# Altium PCB 400861.PcbDoc (part 1 of 7)
Units mm, origin at the board's own origin, x right, y up, seen from the top; angles counter-clockwise.
Board outline 145 x 63.5 mm, 8 copper layers (Top Side, Mid-Layer 1, Mid-Layer 2, Mid-Layer 3, Mid-Layer 4, Mid-Layer 5, Mid-Layer 6, Bottom Side), stack 1.529 mm thick; 287 components, 241 nets, 1164 pads, 3527 vias.
Unrouted connection lines stored in the file: 1.
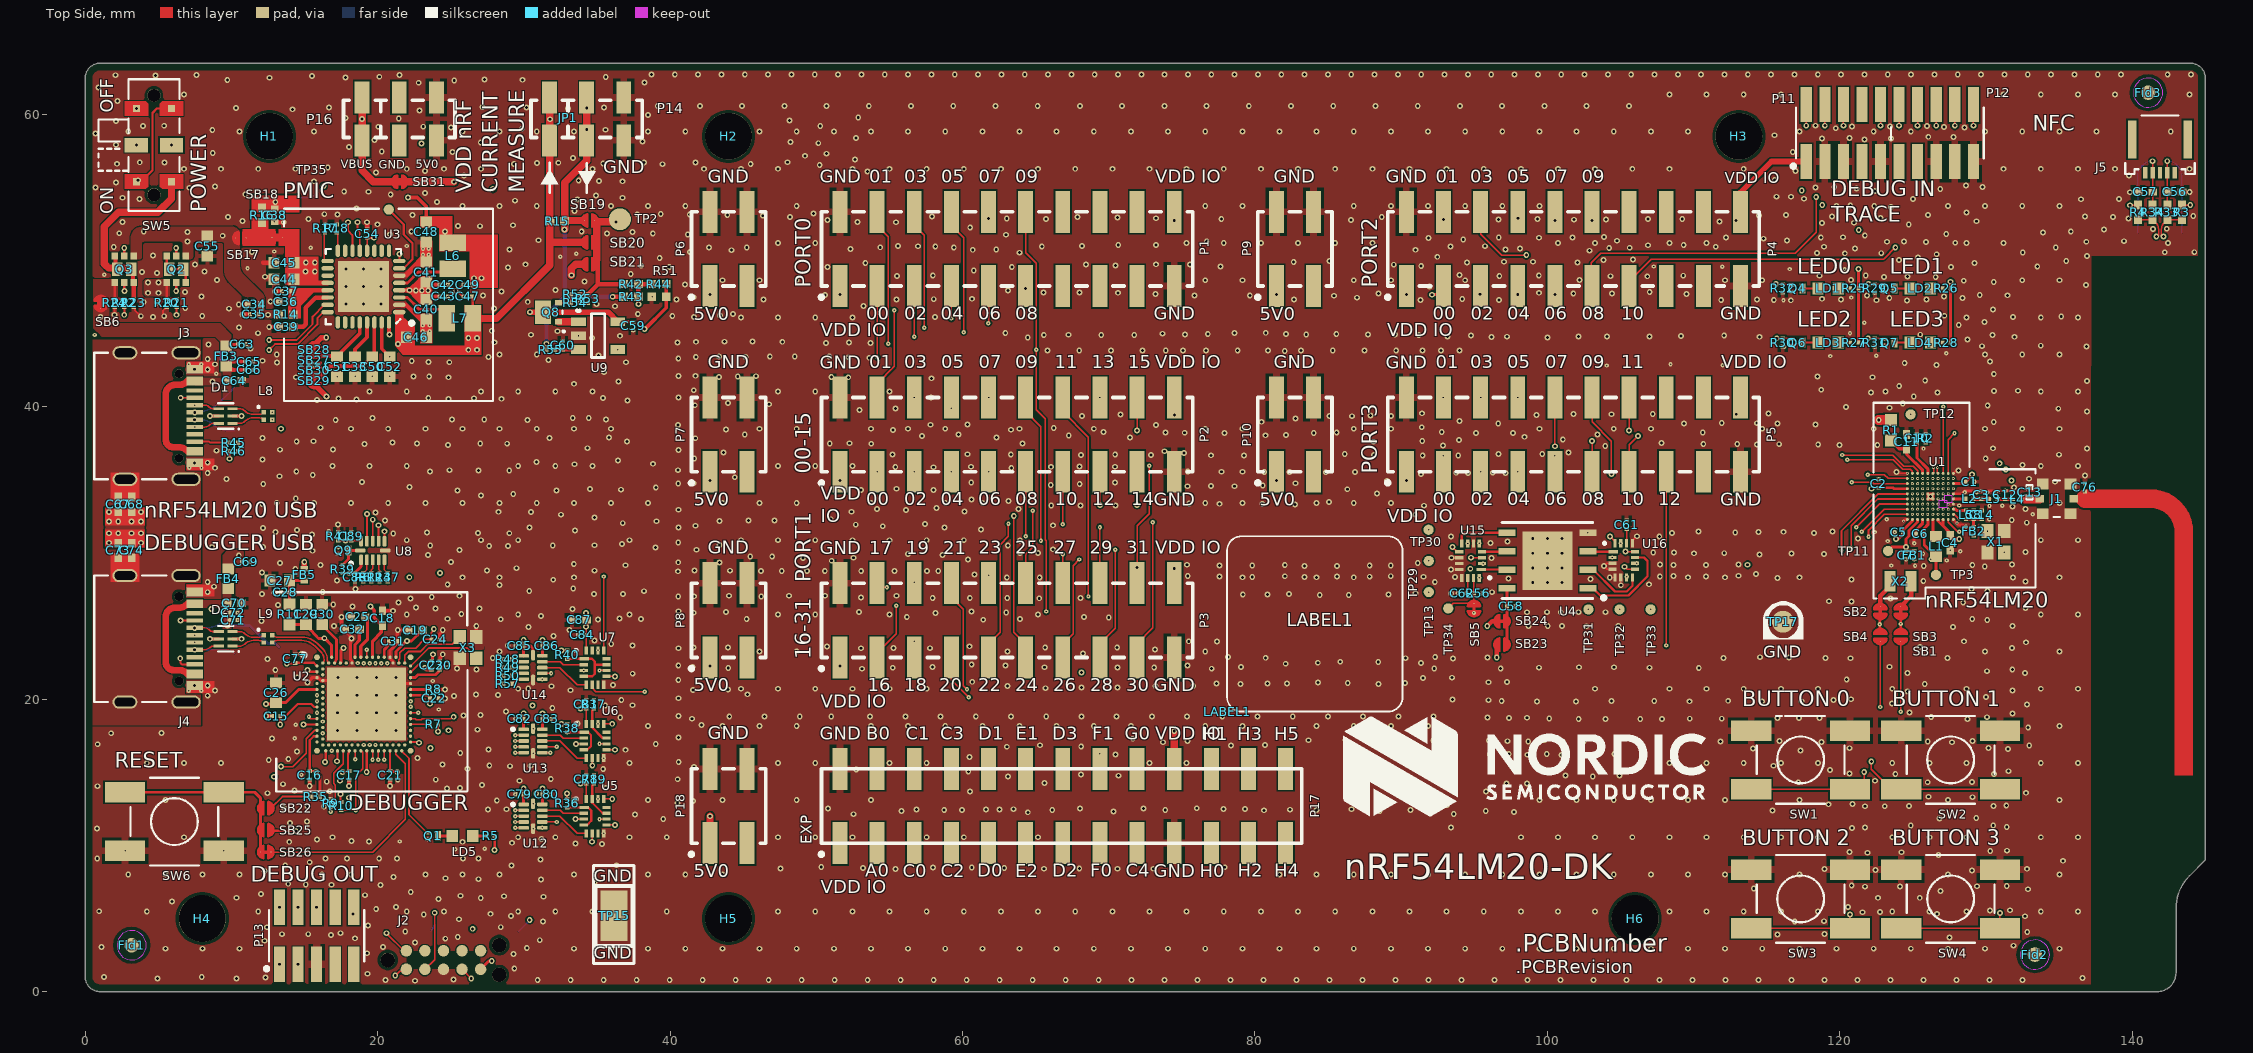
[diagram p0: Top Side view]
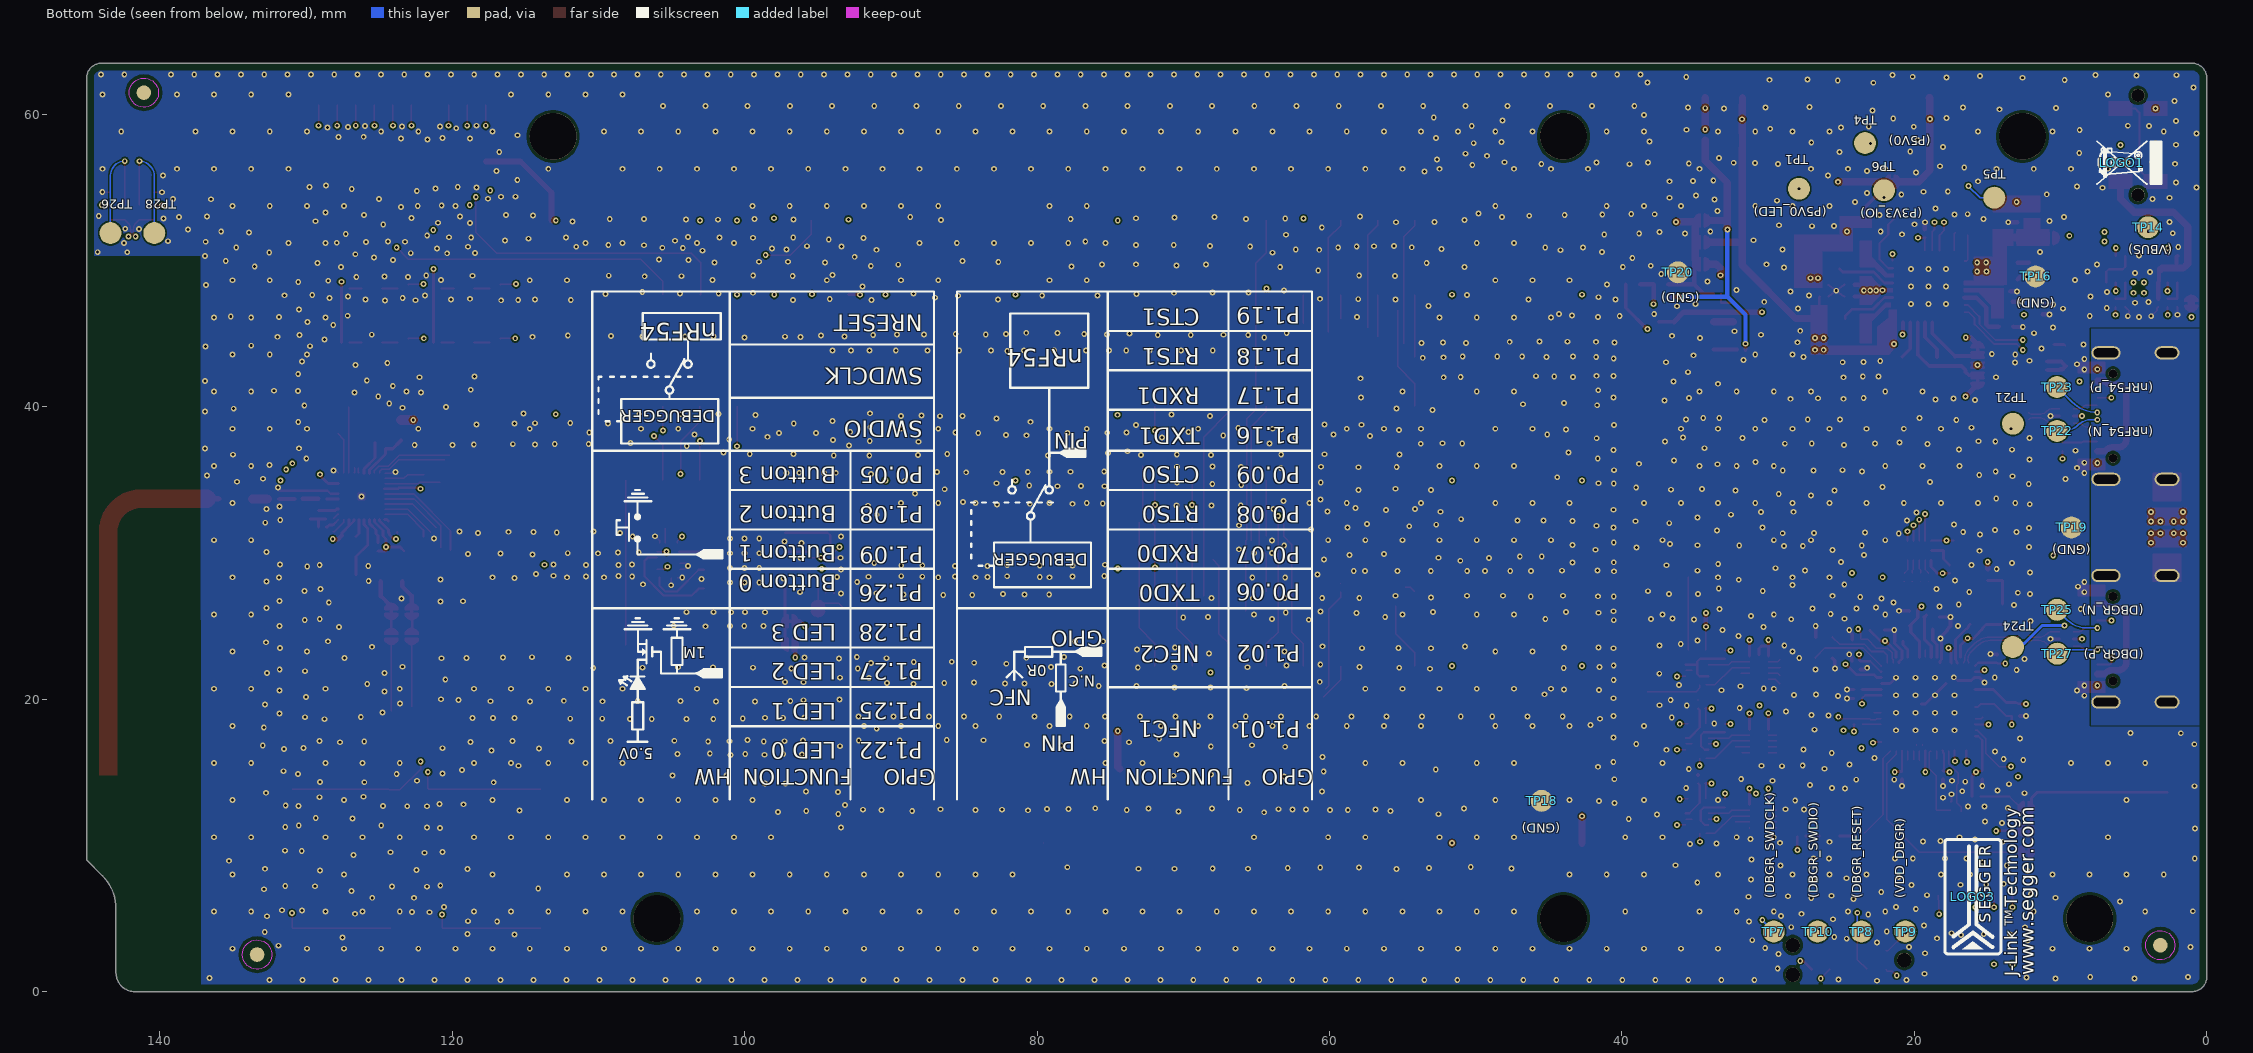
[diagram p1: Bottom Side view, seen from below]
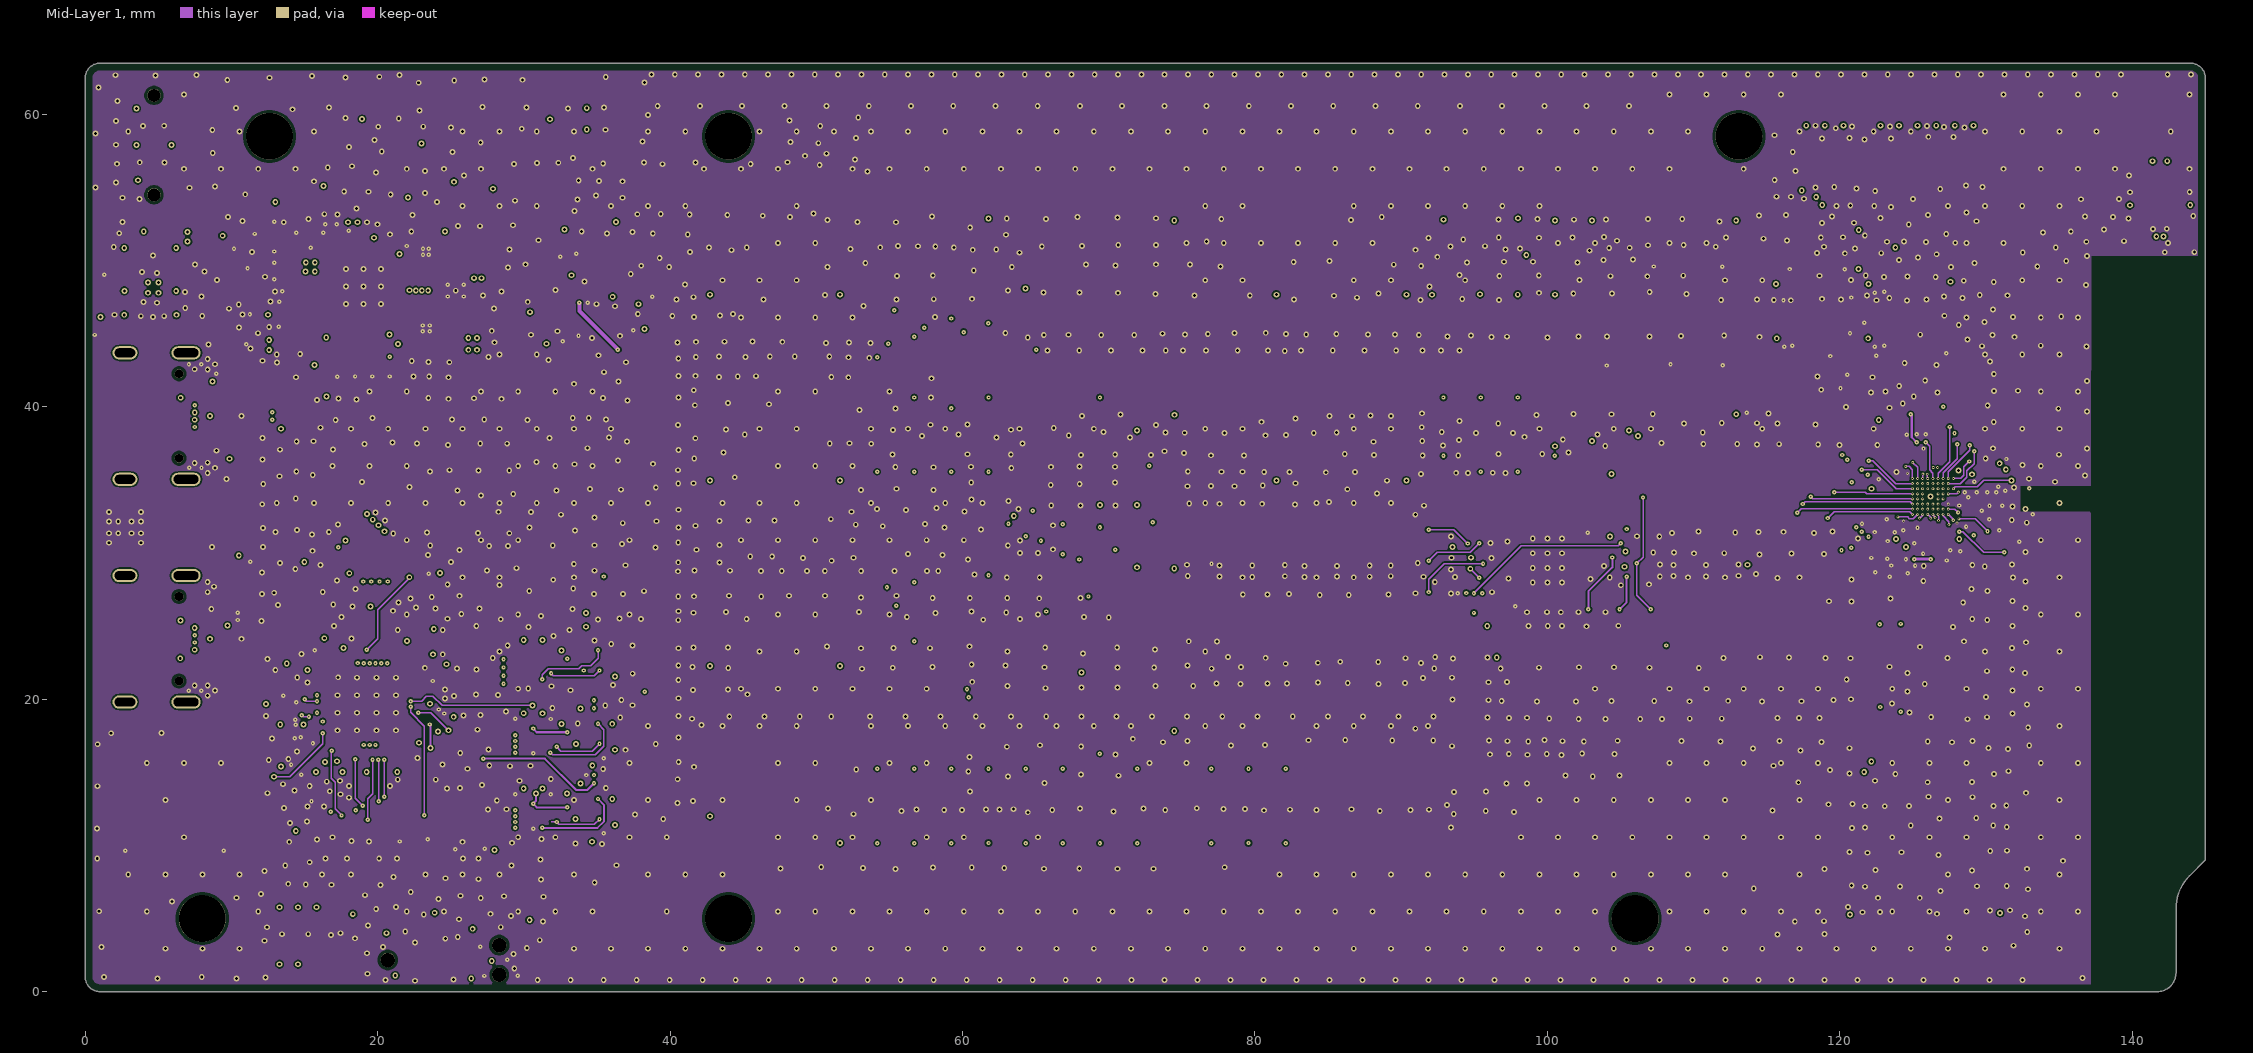
[diagram p2: Mid-Layer 1]
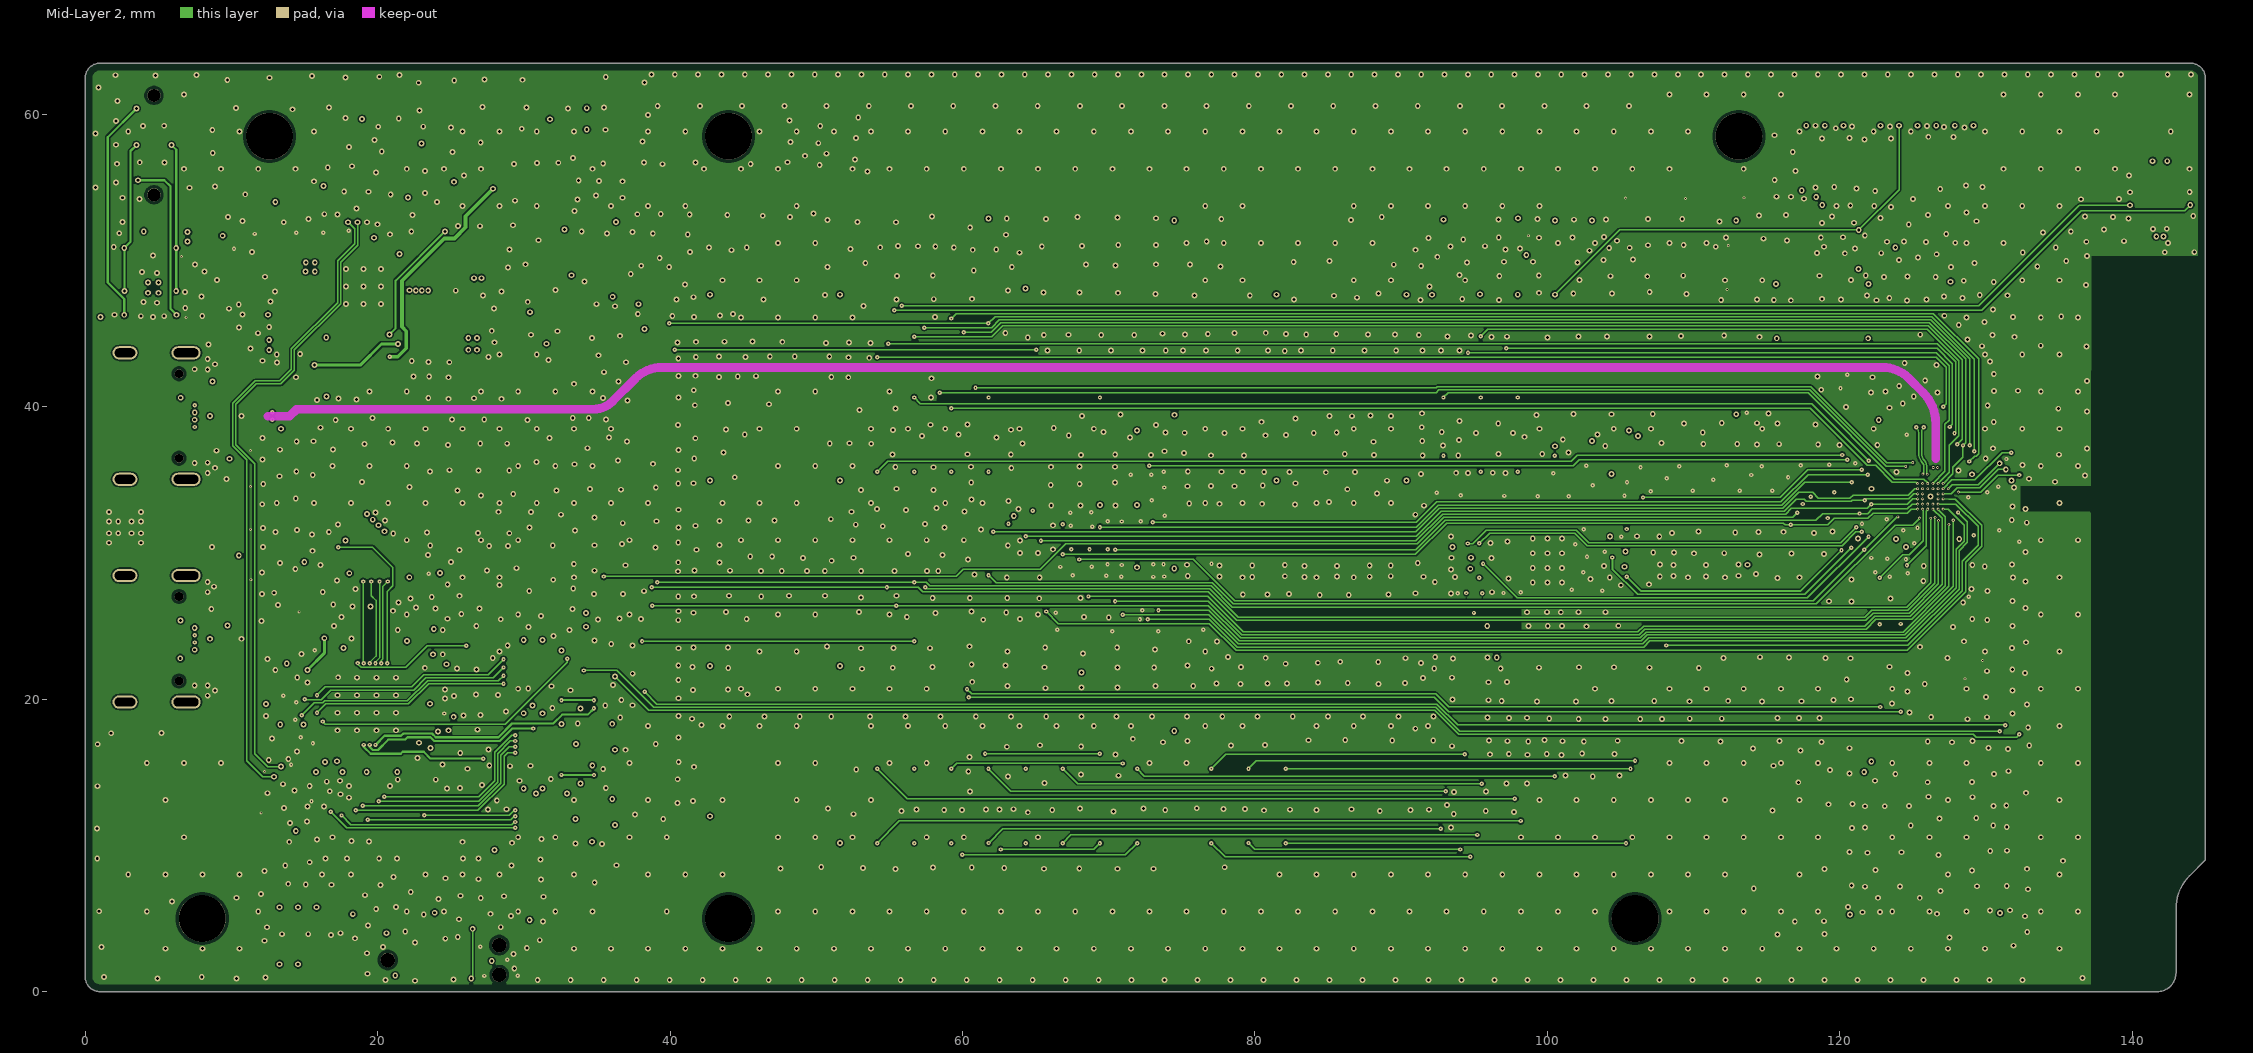
[diagram p3: Mid-Layer 2]
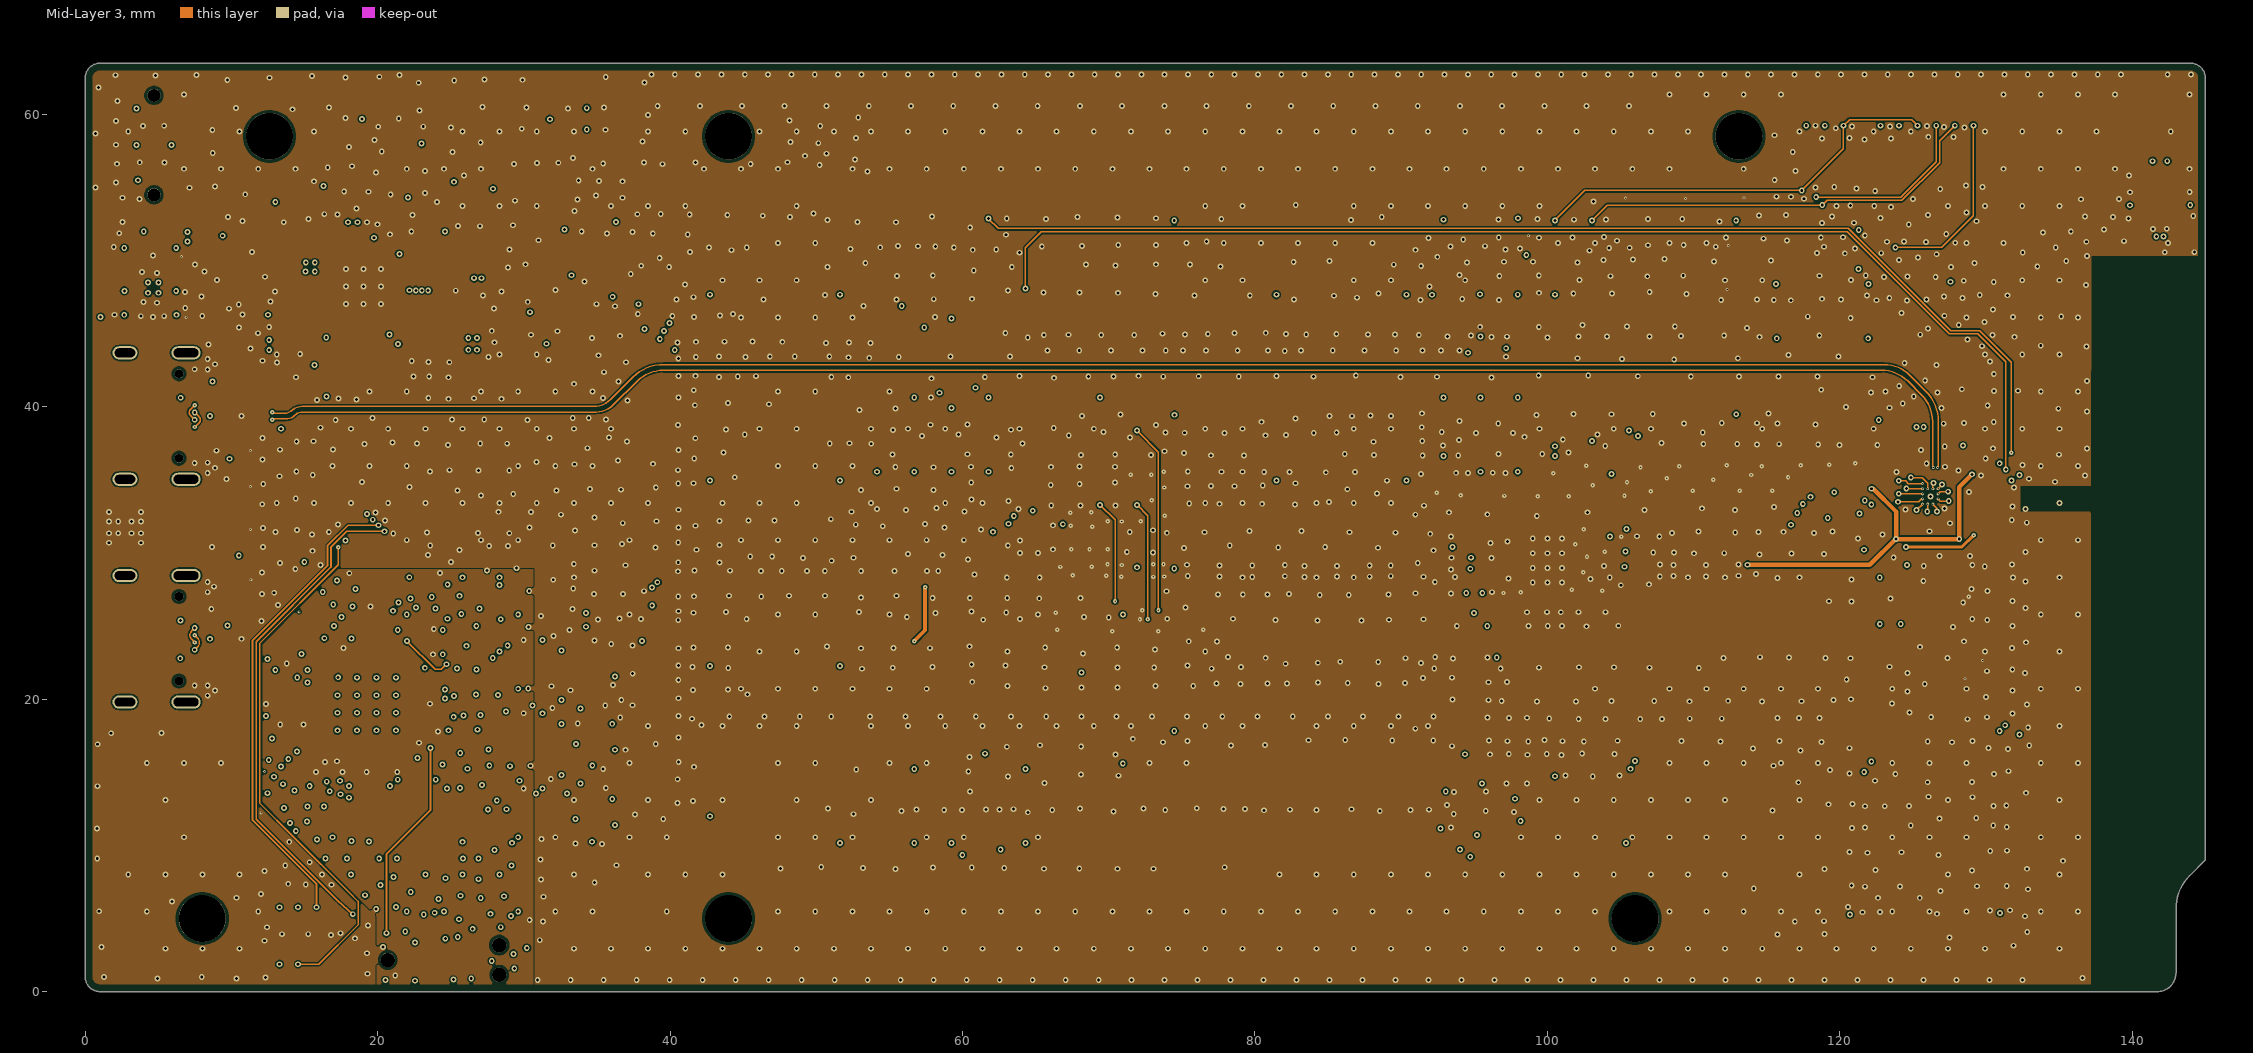
[diagram p4: Mid-Layer 3]
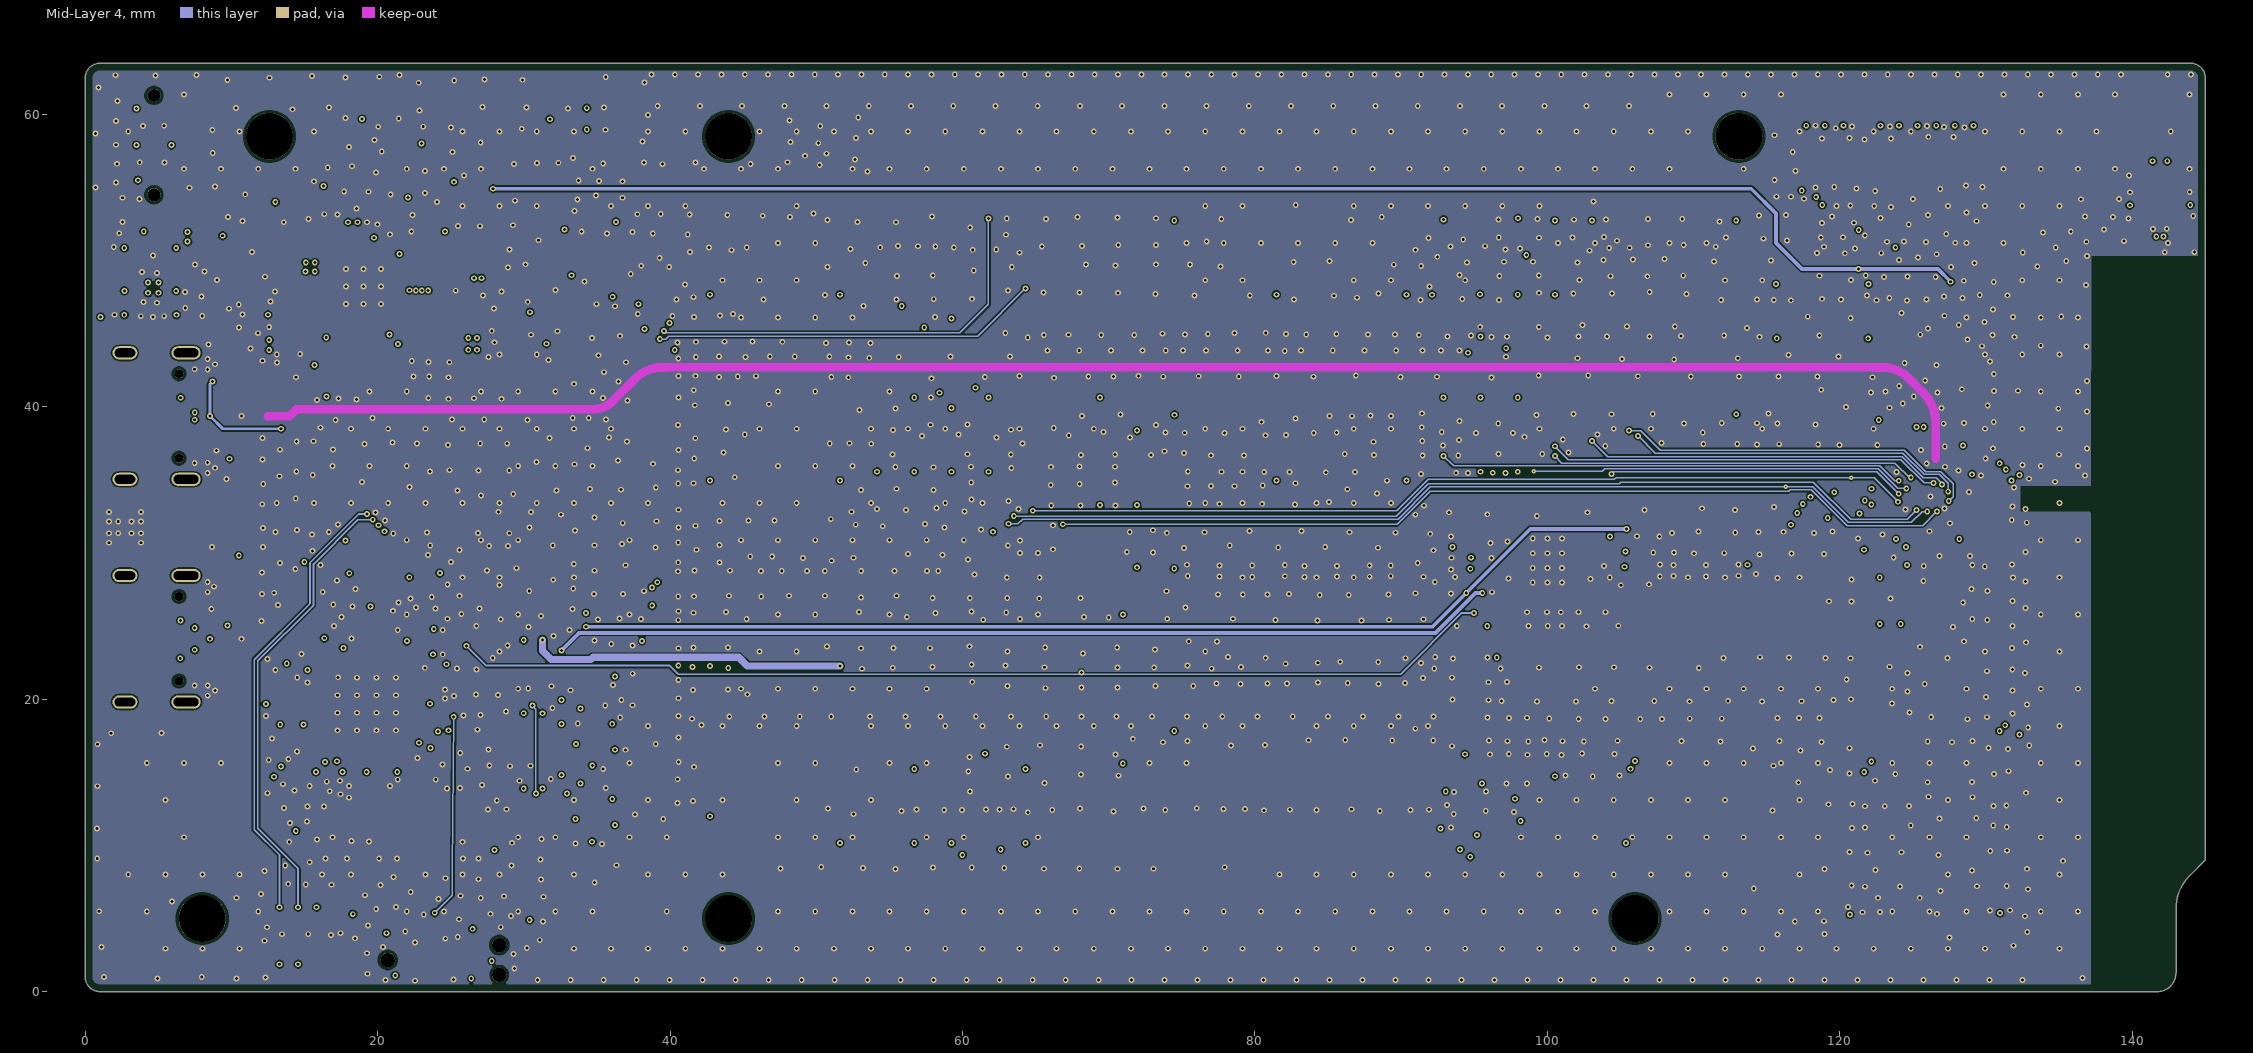
[diagram p5: Mid-Layer 4]
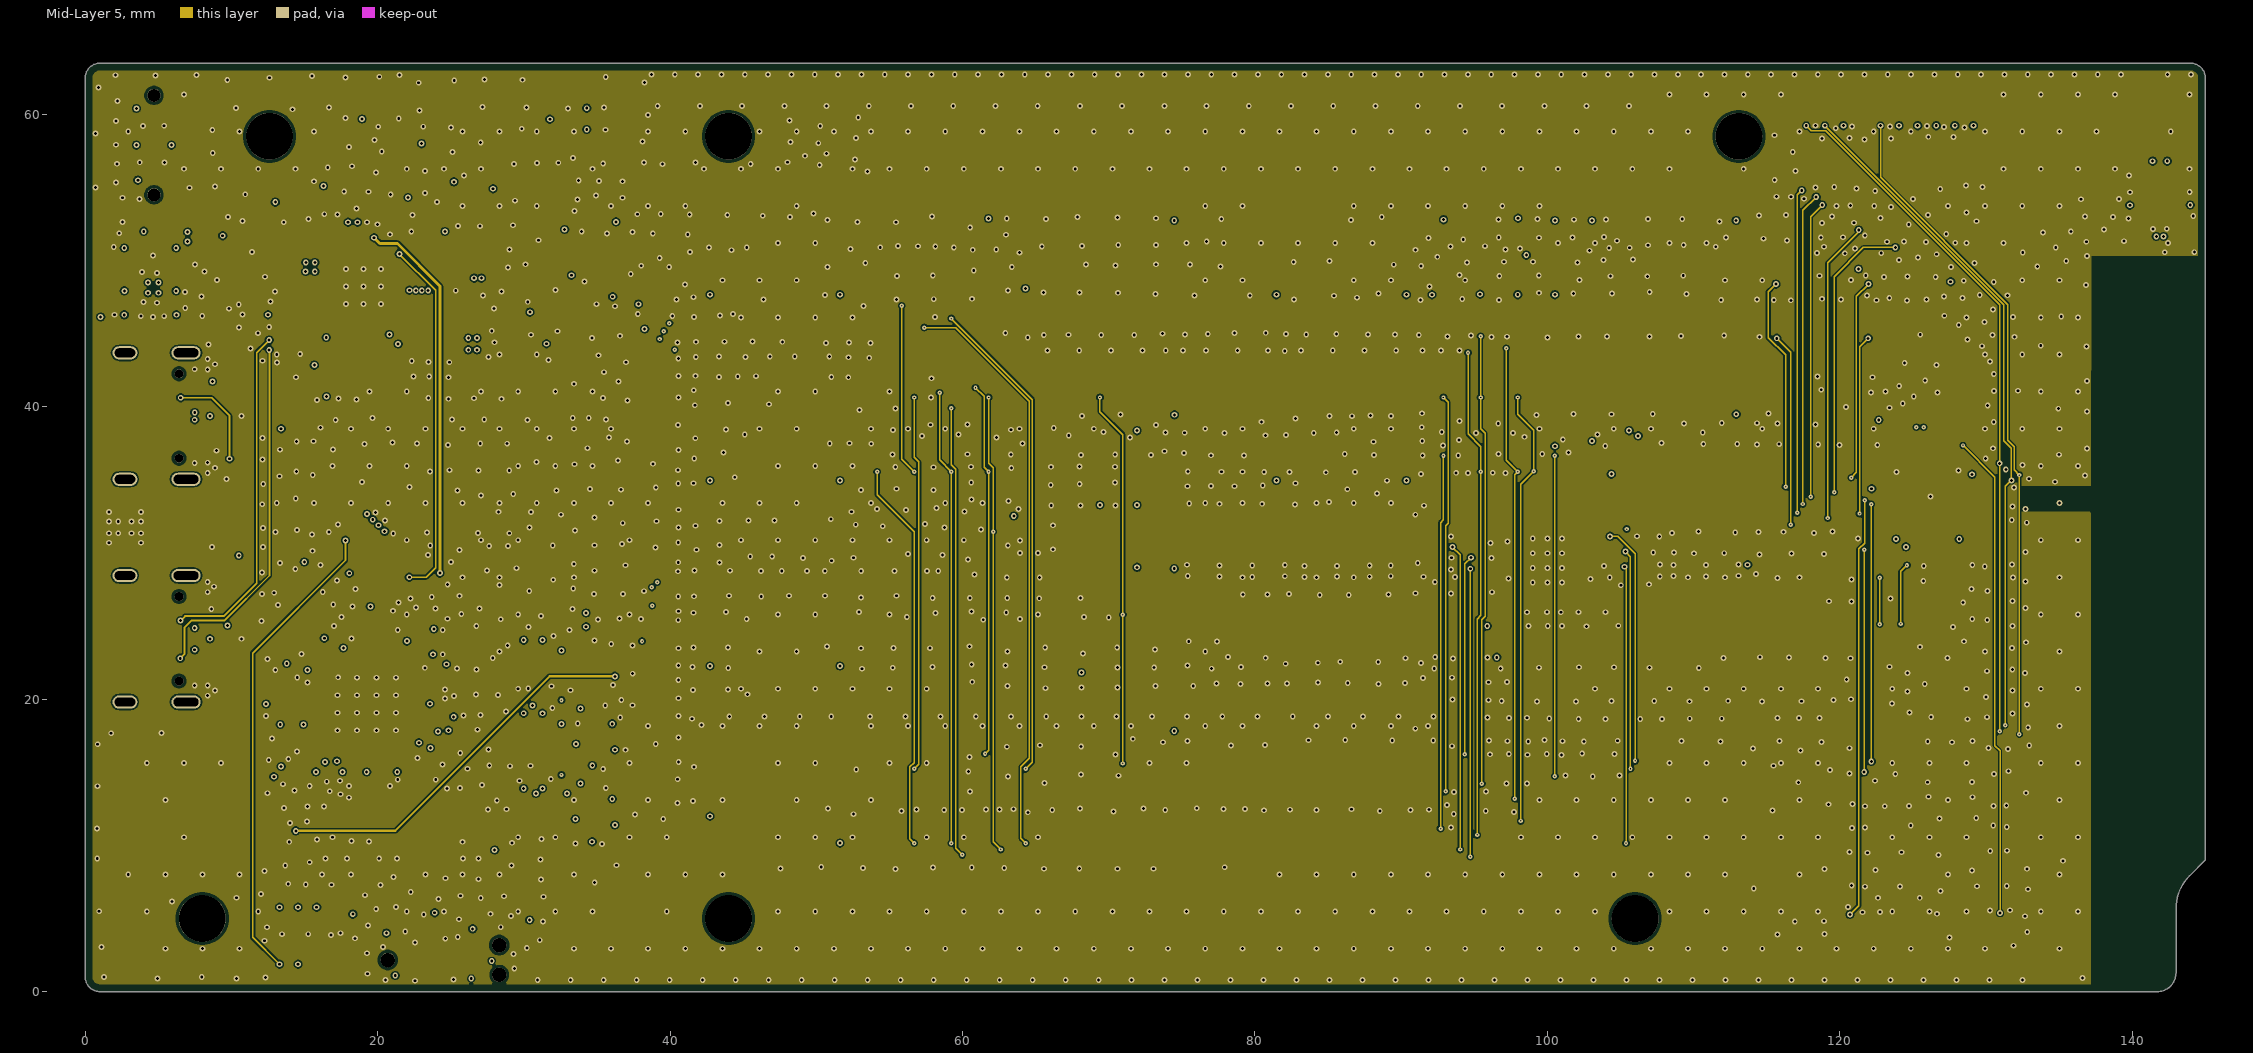
[diagram p6: Mid-Layer 5]
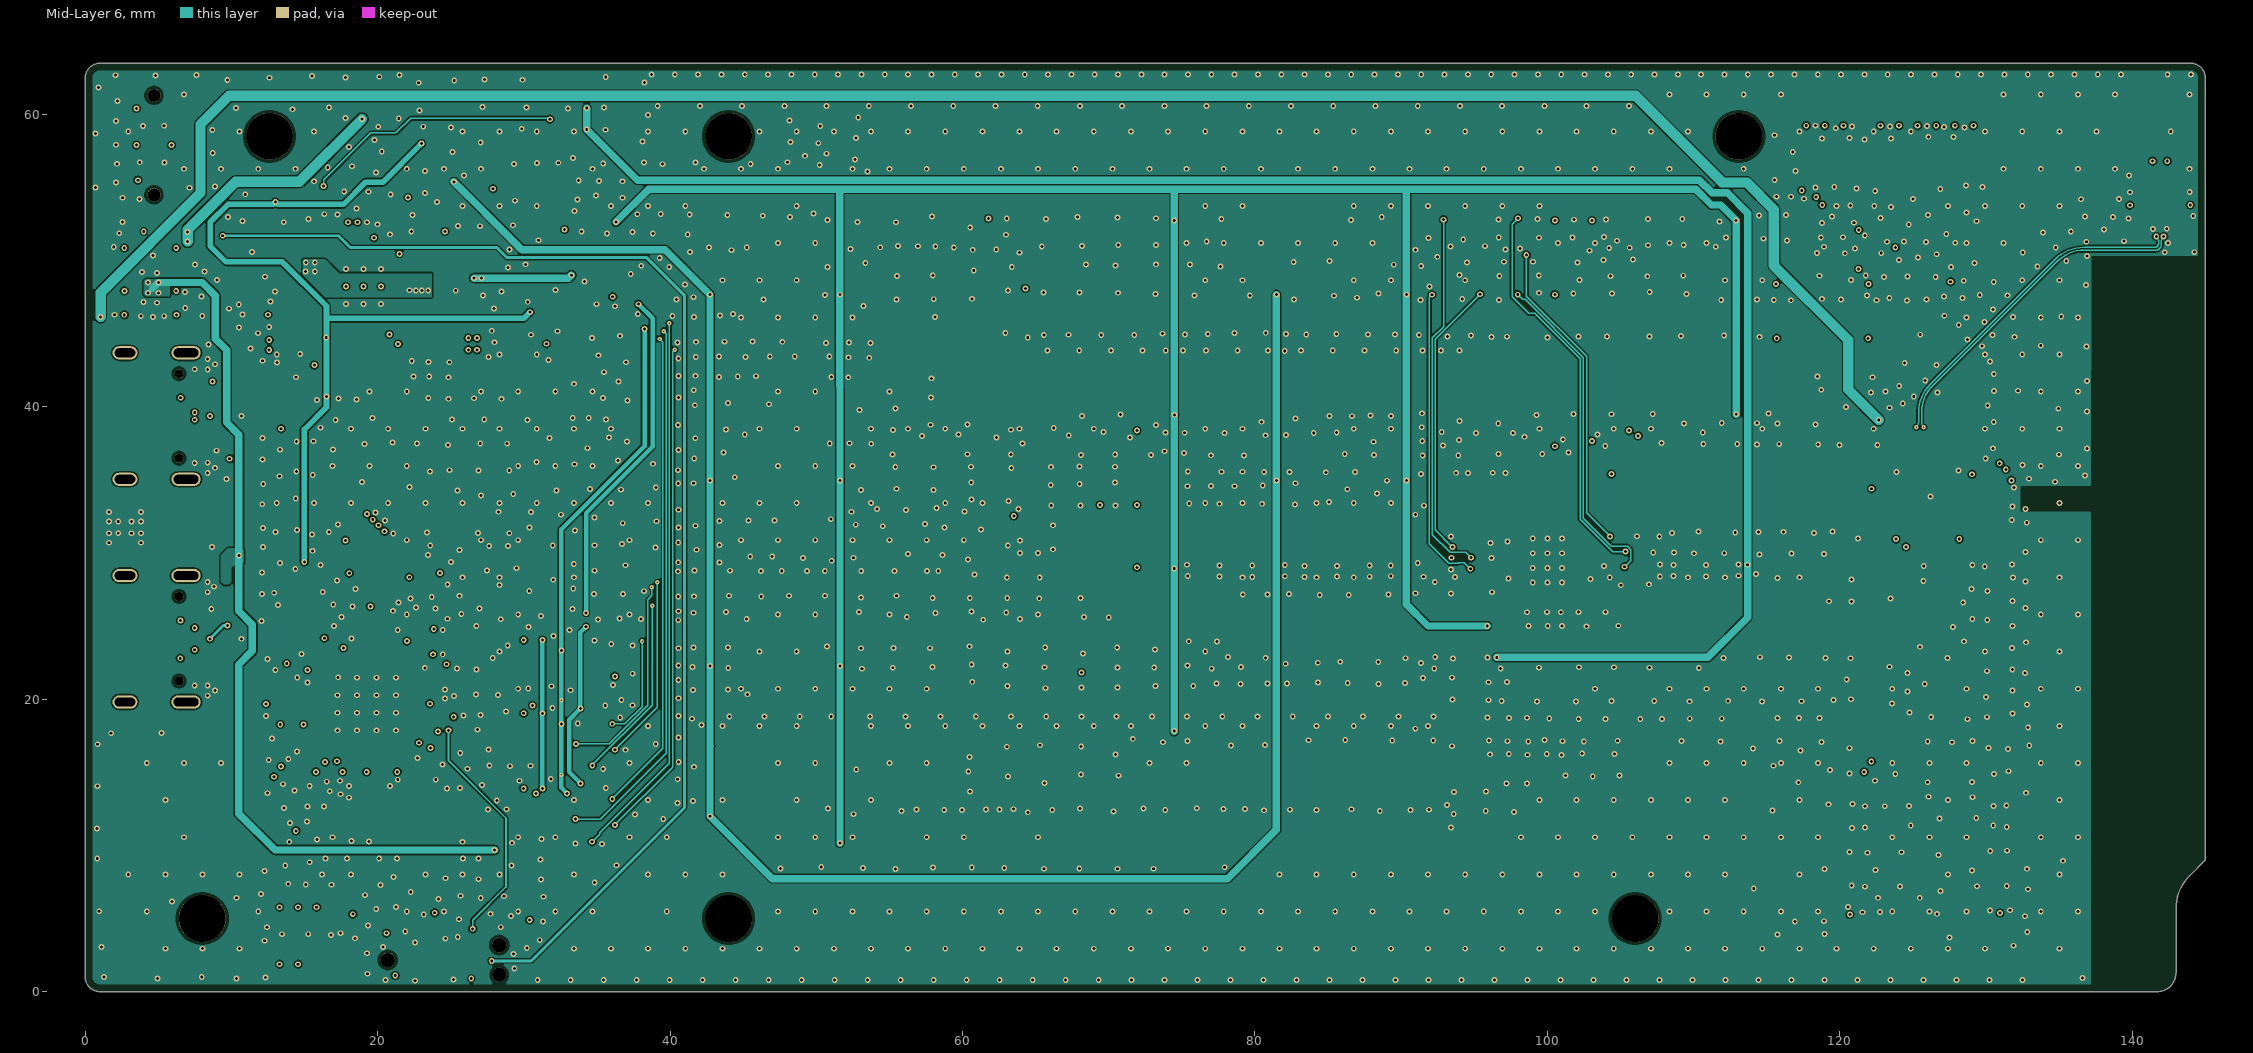
[diagram p7: Mid-Layer 6]
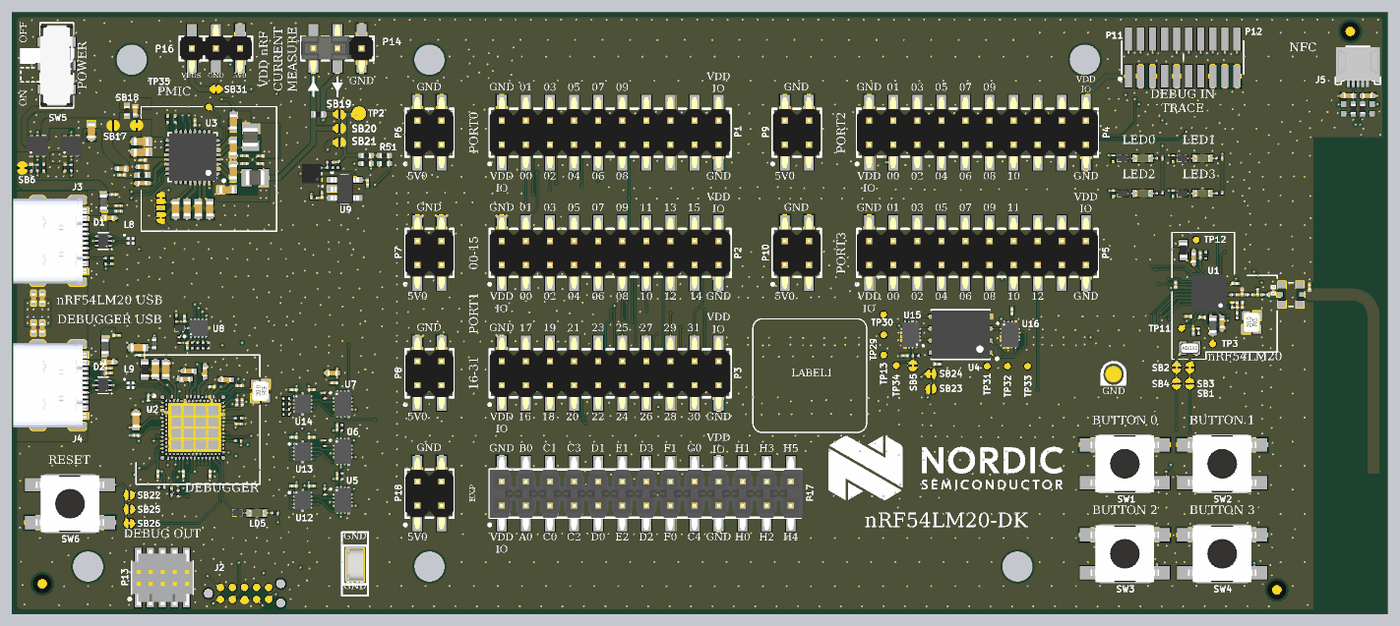
[diagram p13: 3D render of the assembled board from above, using the file's embedded part models]

## Layer stack, top to bottom
Top Solder: solder mask 0.015, WE-SM-0001, Dk 3.3
Top Side: signal copper 0.035
Dielectric 1: prepreg 0.07, WE-PP-0034, Dk 4.3
Mid-Layer 1: signal copper 0.025
Dielectric 2: prepreg 0.07, WE-PP-0034, Dk 4.3
Mid-Layer 2: signal copper 0.025
Dielectric 3: prepreg 0.07, WE-PP-0034, Dk 4.3
Mid-Layer 3: signal copper 0.025
Core 1: core 0.889, Core-041, Dk 4.8
Mid-Layer 4: signal copper 0.025
Dielectric 4: prepreg 0.07, WE-PP-0034, Dk 4.3
Mid-Layer 5: signal copper 0.025
Dielectric 5: prepreg 0.07, WE-PP-0034, Dk 4.3
Mid-Layer 6: signal copper 0.025
Dielectric 6: prepreg 0.07, WE-PP-0034, Dk 4.3
Bottom Side: signal copper 0.035
Bottom Solder: solder mask 0.015, WE-SM-0001, Dk 3.3

## Board outline
0,1 ccw(c1,1) 1,0 1.001,0 141.705,0 ccw(c141.705,1.295) 143,1.295 143,5.705 cw(c146.127,5.705) 143.916,7.916 145,9 145,62.5 ccw(c144,62.5) 144,63.5 144.002,63.5 1,63.5 ccw(c1,62.5) 0,62.5

## Design rules (kind name [scope] priority, off if disabled: settings)
BoardOutlineClearance [All] p1: gap=0.25 ignorepadtopadclearanceinfootprint=FALSE except(0: Arc-SplitContinuation Track-SplitContinuation SMDPad-SplitContinuation THPad-SplitContinuation Via-SplitContinuation Fill-SplitContinuation Poly-SplitContinuation Region-SplitContinuation Text-SplitContinuation; 0.5: Arc-OutlineEdge Track-OutlineEdge SMDPad-OutlineEdge THPad-OutlineEdge Via-OutlineEdge Fill-OutlineEdge Poly-OutlineEdge Region-OutlineEdge Text-OutlineEdge)
Clearance Clearance_fid [InComponent('Fid1')or InComponent('Fid2')or InComponent('Fid3')] p1: gap=0.1 ignorepadtopadclearanceinfootprint=FALSE except(0.25: Arc-Fill Arc-Poly Arc-Region Track-Fill Track-Poly Track-Region SMDPad-Fill SMDPad-Poly SMDPad-Region THPad-Fill THPad-Poly THPad-Region Via-Fill Via-Poly Via-Region Fill-Fill Fill-Poly Fill-Region Poly-Poly Poly-Region Region-Region)
Clearance Clearance_keepout [IsKeepOut] p2: gap=0 ignorepadtopadclearanceinfootprint=FALSE
Clearance Clearance_54L20_room [InComponentClass('nRF54L20')] p3: gap=0.09 ignorepadtopadclearanceinfootprint=FALSE
Clearance "Antenna RF path clearance" [InNetClass('RF')] p4: gap=0.15 ignorepadtopadclearanceinfootprint=FALSE
Clearance "GND polygons" [InPolygonClass('GND')] p5: gap=0.15 ignorepadtopadclearanceinfootprint=FALSE
Clearance Clearance_NPTH [(HoleDiameter > 0) and (PadIsPlated = 'False')] p6: gap=0.254 ignorepadtopadclearanceinfootprint=FALSE except(0.2: Arc-Hole Track-Hole SMDPad-THPad SMDPad-Hole Fill-Hole Poly-Hole Region-Hole)
Clearance "Schematic Clearance Constraint_5" [InComponent('H6')] p7: gap=0.254 ignorepadtopadclearanceinfootprint=TRUE except(0: Arc-Hole Track-Hole SMDPad-Hole THPad-Hole Via-Hole Fill-Hole Poly-Hole Region-Hole Text-Hole)
Clearance "Schematic Clearance Constraint_4" [InComponent('H1')] p8: gap=0.254 ignorepadtopadclearanceinfootprint=TRUE except(0: Arc-Hole Track-Hole SMDPad-Hole THPad-Hole Via-Hole Fill-Hole Poly-Hole Region-Hole Text-Hole)
Clearance "Schematic Clearance Constraint_3" [InComponent('H4')] p9: gap=0.254 ignorepadtopadclearanceinfootprint=TRUE except(0: Arc-Hole Track-Hole SMDPad-Hole THPad-Hole Via-Hole Fill-Hole Poly-Hole Region-Hole Text-Hole)
Clearance "Schematic Clearance Constraint_2" [InComponent('H3')] p10: gap=0.254 ignorepadtopadclearanceinfootprint=TRUE except(0: Arc-Hole Track-Hole SMDPad-Hole THPad-Hole Via-Hole Fill-Hole Poly-Hole Region-Hole Text-Hole)
Clearance "Schematic Clearance Constraint_1" [InComponent('H2')] p11: gap=0.254 ignorepadtopadclearanceinfootprint=TRUE except(0: Arc-Hole Track-Hole SMDPad-Hole THPad-Hole Via-Hole Fill-Hole Poly-Hole Region-Hole Text-Hole)
Clearance "Schematic Clearance Constraint" [InComponent('H5')] p12: gap=0.254 ignorepadtopadclearanceinfootprint=TRUE except(0: Arc-Hole Track-Hole SMDPad-Hole THPad-Hole Via-Hole Fill-Hole Poly-Hole Region-Hole Text-Hole)
Clearance [All] p13: gap=0.1 ignorepadtopadclearanceinfootprint=FALSE except(0: Region-Region; 0.051: Text-Text)
ComponentClearance "Jumper clearance" [All] p1 off: gap=0 collisioncheckmode=3 verticalgap=0 showdistances=FALSE checkcomponentboundary=TRUE
ComponentClearance "Solder bridge overlap" [All] p2 off: gap=0.254 collisioncheckmode=3 verticalgap=2540 showdistances=FALSE donotcheckwithout3dbody=TRUE checkcomponentboundary=TRUE
ComponentClearance [All] p3 off: gap=0 collisioncheckmode=3 verticalgap=2540 showdistances=TRUE
DiffPairsRouting DiffPairsRouting_NFC [InDifferentialPair('NFC')] p1: maxlimit=0.4 minlimit=0.1 mostfreqgap=0.1 toplayer_minwidth=0.1 toplayer_maxwidth=0.5 toplayer_prefwidth=0.1 midlayer1_minwidth=0.1 midlayer1_maxwidth=0.5 midlayer1_prefwidth=0.1 midlayer2_minwidth=0.1 midlayer2_maxwidth=0.5 midlayer2_prefwidth=0.1 midlayer3_minwidth=0.1 midlayer3_maxwidth=0.5 midlayer3_prefwidth=0.1 midlayer4_minwidth=0.1 midlayer4_maxwidth=0.5 midlayer4_prefwidth=0.1 midlayer5_minwidth=0.1 midlayer5_maxwidth=0.5 midlayer5_prefwidth=0.1 midlayer6_minwidth=0.1 midlayer6_maxwidth=0.5 midlayer6_prefwidth=0.1 bottomlayer_minwidth=0.1 bottomlayer_maxwidth=0.5 bottomlayer_prefwidth=0.1 maxuncoupledlength=12.7
DiffPairsRouting DiffPairsRouting_USB [InNetClass('USB')] p2: maxlimit=0.3 minlimit=0.127 mostfreqgap=0.3 toplayer_maxgap=0.127 toplayer_prefgap=0.127 toplayer_minwidth=0.099 toplayer_maxwidth=0.099 toplayer_prefwidth=0.099 midlayer1_maxgap=0.127 midlayer1_prefgap=0.127 midlayer1_minwidth=0.049 midlayer1_maxwidth=0.049 midlayer1_prefwidth=0.049 midlayer2_maxgap=0.127 midlayer2_prefgap=0.127 midlayer2_minwidth=0.049 midlayer2_maxwidth=0.049 midlayer2_prefwidth=0.049 midlayer3_mingap=0.3 midlayer3_minwidth=0.09 midlayer3_maxwidth=0.09 midlayer3_prefwidth=0.09 midlayer4_mingap=0.3 midlayer4_minwidth=0.09 midlayer4_maxwidth=0.09 midlayer4_prefwidth=0.09 midlayer5_maxgap=0.127 midlayer5_prefgap=0.127 midlayer5_minwidth=0.049 midlayer5_maxwidth=0.049 midlayer5_prefwidth=0.049 midlayer6_maxgap=0.127 midlayer6_prefgap=0.127 midlayer6_minwidth=0.049 midlayer6_maxwidth=0.049 midlayer6_prefwidth=0.049 bottomlayer_maxgap=0.127 bottomlayer_prefgap=0.127 bottomlayer_minwidth=0.099 bottomlayer_maxwidth=0.099 bottomlayer_prefwidth=0.099 impedanceprofiledriven=TRUE impedanceprofileid={92417A29-2017-4163-8AF2-36A2DA04E51D} impedanceprofilevalue=90.000000 maxuncoupledlength=12.7
Height [All] p1 off: minheight=0 maxheight=25.4 prefheight=12.7
HoleSize [All] p1: absolutevalues=TRUE maxlimit=5 minlimit=0.025 maxpercent=80.000 minpercent=20.000
HoleToHoleClearance HoleToHoleClearance_nRF54 [WithinRoom('nRF54L20')] p1: gap=0.1 allowstackedmicrovias=TRUE
HoleToHoleClearance [All] p2: gap=0.15 allowstackedmicrovias=TRUE
MatchedLengths "Schematic Matched Net Lengths" [InNetClass('TRACE')] p1: tolerance=25.4 checknetsindiffpair=FALSE checkdiffpairvsdiffpair=TRUE checkxsignals=TRUE checkothers=TRUE usedelayunits=TRUE delaytolerance=500.000000
MinimumSolderMaskSliver [All] p1: minsoldermaskwidth=0.1
PolygonConnect "VBUS polygons" [InNet('VBUS') or InNet('VBUS_nRF') or InNet('VBUS_DBGR')] p1: connectstyle=Direct reliefconductorwidth=0.25 reliefentries=4 polygonreliefangle="90 Angle" airgapwidth=0.15
PolygonConnect "GND Polygon RF Comp" [InComponent('C3') or InComponent('C12') or InComponent('C13')] p2: connectstyle=Direct reliefconductorwidth=0.25 reliefentries=4 polygonreliefangle="90 Angle" airgapwidth=0.15
PolygonConnect "GND Polygon and Vias" [IsVia and InNet('GND')] p3: connectstyle=Direct reliefconductorwidth=0.254 reliefentries=4 polygonreliefangle="90 Angle" airgapwidth=0.254
PolygonConnect "GND Polygon and connectors" [InNet('GND') and InComponent('P*')] p4: connectstyle=Relief reliefconductorwidth=0.5 reliefentries=4 polygonreliefangle="90 Angle" conductorbypadedge=TRUE mindistance=0.25 enablemindistance=TRUE airgapwidth=0.2
PolygonConnect "GND Polygon and switches" [InNet('GND') and InComponent('SW*')] p5: connectstyle=Relief reliefconductorwidth=0.5 reliefentries=4 polygonreliefangle="90 Angle" conductorbypadedge=TRUE mindistance=0.25 enablemindistance=TRUE airgapwidth=0.2
PolygonConnect PolygonConnect_1 [IsPad and not InNet('GND') vs IsPolygon] p6: connectstyle=Direct reliefconductorwidth=0.254 reliefentries=4 polygonreliefangle="90 Angle" airgapwidth=0.254
PolygonConnect "GND Polygon and components" [InNet('GND') and InComponent('R*') or InComponent('C*') or InNamedPolygon('GND_nRF54')] p7: connectstyle=Relief reliefconductorwidth=0.3 reliefentries=4 polygonreliefangle="90 Angle" conductorbypadedge=TRUE mindistance=0.25 enablemindistance=TRUE airgapwidth=0.2
PolygonConnect [All] p8: connectstyle=Direct reliefconductorwidth=0.254 reliefentries=4 polygonreliefangle="90 Angle" airgapwidth=0.254
RoomDefinition Flash [InComponentClass('Flash')] p1: confinementstyle=ConfineIn formatcopy=TRUE lockcomponents=FALSE outline 94.28,17.972 94.28,20.772 95.926,20.772 95.926,21.147 96.451,21.147 96.451,25.647 104.181,25.647 104.181,19.997 95.683,19.997 95.683,17.972
RoomDefinition nRF54 [InComponentClass('nRF54')] p2: confinementstyle=ConfineIn formatcopy=TRUE lockcomponents=FALSE outline 123.856,31.657 128.476,31.657 128.476,36.5 123.856,36.5
RoomDefinition "Power Switch" [InComponentClass('Power Switch')] p3: confinementstyle=ConfineIn formatcopy=TRUE lockcomponents=FALSE outline -0.056,53.17 -0.056,62.831 9.156,62.831 9.156,49.279 12.679,49.279 12.679,46.721 6.779,46.721 6.779,46.302 6.104,46.302 3.854,46.302 3.209,46.302 2.141,46.302 1.486,46.302 1.486,47.557 0.816,47.557 0.816,53.17
RoomDefinition "Current measurments" [InComponentClass('Current measurments')] p4: confinementstyle=ConfineIn formatcopy=TRUE lockcomponents=FALSE outline 30.081,58.98 30.081,62.231 30.109,62.231 30.109,63.351 38.491,63.351 38.491,57.52 33.505,57.52 33.505,55.695 31.095,55.695 31.095,57.52 30.109,57.52 30.109,58.98
RoomDefinition nPM1300 [InComponentClass('nPM1300')] p5: confinementstyle=ConfineIn formatcopy=TRUE lockcomponents=FALSE outline 9.694,50.696 9.694,52.404 11.395,52.404 11.395,54.306 13.25,54.306 13.25,55.585 20.794,55.585 20.794,56.093 22.089,56.093 22.089,59.318 24.647,59.318 24.647,56.194 29.168,56.194 29.168,53.636 27.591,53.636 27.591,44.568 24.129,44.568 24.129,43.946 20.805,43.946 20.805,41.695 20.604,41.695 20.604,40.64 18.396,40.64 18.396,41.521 18.271,41.521 18.271,42.396 15.946,42.396 15.946,44.821 12.527,44.821 12.527,45.816 10.771,45.816 10.771,46.346 10.446,46.346 10.446,50.696
RoutingVias RoutingVia_RF54L20 [WithinRoom('nRF54')] p1: holewidth=0.711 width=1.27 viastyle="Through Hole" minholewidth=0.711 minwidth=1.27 maxholewidth=0.711 maxwidth=1.27 useviatemplates=TRUE viatemplateguid#1={EEEC76CF-32D6-49DC-93D9-2D917E6DBA36} viatemplateguid#2={30F8C89D-5C5B-4339-859E-098A5C8AA5FD} viatemplateguid#3={3D985D34-457C-4E2A-A3DE-9B1BD65E1015} viatemplatename#1=v20h10 viatemplatename#2=v30h10m0 viatemplatename#3=v40h20m0mx0
RoutingVias RoutingVia_Blind [IsBlindVia] p2: holewidth=0.711 width=1.27 viastyle="Through Hole" minholewidth=0.711 minwidth=1.27 maxholewidth=0.711 maxwidth=1.27 useviatemplates=TRUE viatemplateguid#1={30F8C89D-5C5B-4339-859E-098A5C8AA5FD} viatemplatename#1=v30h10m0
RoutingVias RoutingVia_Burried [InDrillLayerPair('Mid-Layer 3 - Mid-Layer 4')] p3: holewidth=0.711 width=1.27 viastyle="Through Hole" minholewidth=0.711 minwidth=1.27 maxholewidth=0.711 maxwidth=1.27 useviatemplates=TRUE viatemplateguid#1={3D985D34-457C-4E2A-A3DE-9B1BD65E1015} viatemplatename#1=v40h20m0mx0
RoutingVias RoutingVia_Burried_laser [InDrillLayerPair('Mid-Layer 1 - Mid-Layer 2') or  InDrillLayerPair('Mid-Layer 2 - Mid-Layer 3') or InDrillLayerPair('Mid-Layer 4 - Mid-Layer 5') or  InDrillLayerPair('Mid-Layer 5 - Mid-Layer 6')] p4: holewidth=0.711 width=1.27 viastyle="Through Hole" minholewidth=0.711 minwidth=1.27 maxholewidth=0.711 maxwidth=1.27 useviatemplates=TRUE viatemplateguid#1={30F8C89D-5C5B-4339-859E-098A5C8AA5FD} viatemplatename#1=v30h10m0
RoutingVias RoutingVia_Thru [IsThruVia] p5: holewidth=0.25 width=0.5 viastyle="Through Hole" minholewidth=0.1 minwidth=0.2 maxholewidth=0.5 maxwidth=1.2 useviatemplates=TRUE viatemplateguid#1={3D985D34-457C-4E2A-A3DE-9B1BD65E1015} viatemplatename#1=v40h20m0mx0
RoutingVias "Schematic Routing Via Style_5" [InComponent('H5')] p6: holewidth=0 width=0 viastyle="Through Hole" minholewidth=0 minwidth=0 maxholewidth=2 maxwidth=2
RoutingVias "Schematic Routing Via Style_4" [InComponent('H1')] p7: holewidth=0 width=0 viastyle="Through Hole" minholewidth=0 minwidth=0 maxholewidth=2 maxwidth=2
RoutingVias "Schematic Routing Via Style_3" [InComponent('H6')] p8: holewidth=0 width=0 viastyle="Through Hole" minholewidth=0 minwidth=0 maxholewidth=2 maxwidth=2
RoutingVias "Schematic Routing Via Style_2" [InComponent('H4')] p9: holewidth=0 width=0 viastyle="Through Hole" minholewidth=0 minwidth=0 maxholewidth=2 maxwidth=2
RoutingVias "Schematic Routing Via Style_1" [InComponent('H2')] p10: holewidth=0 width=0 viastyle="Through Hole" minholewidth=0 minwidth=0 maxholewidth=2 maxwidth=2
RoutingVias "Schematic Routing Via Style" [InComponent('H3')] p11: holewidth=0 width=0 viastyle="Through Hole" minholewidth=0 minwidth=0 maxholewidth=2 maxwidth=2
ShortCircuit "GND to PVSS" [InNet('PVSS1') or InNet('PVSS2') vs InNet('GND')] p1: allowed=TRUE
ShortCircuit P11_P12 [InComponent('P11') vs InComponent('P12')] p2: allowed=TRUE
ShortCircuit [All] p3: allowed=FALSE
SolderMaskExpansion SolderMaskExpansion_Comp1 [HasFootprint('BGA98C35P10X10_367X385X86') or HasFootprint('AQFN40P700X700X85_HS-99N') or HasFootprint('XFDFN40P180X120X40-8M')] p1: expansion=0.025 istentingtop=FALSE
SolderMaskExpansion SolderMaskExpansion_Comp2 [HasFootprint('Nordic_QFN50P500X500X90-33N') or HasFootprint('SD-80259-001')] p2: expansion=0.05 istentingtop=FALSE
SolderMaskExpansion SolderMaskExpansion_Via [IsVia] p3: expansion=0.102 istentingtop=TRUE
SolderMaskExpansion [All] p4: expansion=0.102 istentingtop=FALSE
SupplyNets "Schematic Supply Nets_6" [InNet('5V0:CONN')] p1: voltage=0.000
SupplyNets "Schematic Supply Nets_15" [InNet('VDD:IO')] p2: voltage=0.000
SupplyNets "Schematic Supply Nets_14" [InNet('VDD:SW_PU')] p3: voltage=0.000
SupplyNets "Schematic Supply Nets_11" [InNet('VDD:nRF_PMIC')] p4: voltage=0.000
SupplyNets "Schematic Supply Nets_4" [InNet('VDD:SW')] p5: voltage=0.000
SupplyNets "Schematic Supply Nets_3" [InNet('P5V0:LED')] p6: voltage=0.000
SupplyNets "Schematic Supply Nets_7" [InNet('VDD:SWD0')] p7: voltage=0.000
SupplyNets "Schematic Supply Nets_10" [InNet('VBUS:DBGR')] p8: voltage=0.000
SupplyNets "Schematic Supply Nets_2" [InNet('VDD:nRF')] p9: voltage=0.000
SupplyNets "Schematic Supply Nets_13" [InNet('VDD:DBGR')] p10: voltage=0.000
SupplyNets "Schematic Supply Nets_12" [InNet('VBUS:nRF')] p11: voltage=0.000
SupplyNets "Schematic Supply Nets_9" [InNet('P5V0')] p12: voltage=0.000
SupplyNets "Schematic Supply Nets_8" [InNet('GND')] p13: voltage=0.000
SupplyNets "Schematic Supply Nets_5" [InNet('Shield')] p14: voltage=0.000
SupplyNets "Schematic Supply Nets_1" [InNet('VBUS')] p15: voltage=0.000
Width "Antena width" [InNet('ANT')] p1: maxlimit=2 minlimit=0.1 preferedwidth=0.254
Width "RF class" [InNetClass('RF')] p2: maxlimit=0.735 minlimit=0.1 preferedwidth=0.1 toplayer_prefwidth=0.735 midlayer1_maxwidth=0.2 midlayer2_maxwidth=0.2 midlayer3_maxwidth=0.2 midlayer4_maxwidth=0.2 midlayer5_maxwidth=0.2 midlayer6_maxwidth=0.2 bottomlayer_maxwidth=0.2 minimp=50.000000 maximp=50.000000 favimp=50.000000 checkconnectedcopper=TRUE
Width [All] p3: maxlimit=1 minlimit=0.09 preferedwidth=0.1
23 further rules are at their usual default settings.

## Classes and differential pairs
component class Switches: C61 C62 R56 SB5 TP13 TP29 TP30 TP31 TP32 TP33 TP34 U15 U16
component class nRF54: U1
net class RF: ANT ant:1 ant:2 ant:3 ant:4
differential pair class NFC: NFC
component class "Power Switch": C55 Q2 Q3 R20 R21 R22 R23 R24 SB6 SW5 TP14
component class nPM1300: C33 C34 C35 C36 C37 C38 C39 C40 C41 C42 C43 C44 C45 C46 C47 C48 C49 C50 C51 C52 C54 L6 L7 R14 R16 R17 R18 SB17 SB18 SB20 SB21 SB27 SB28 SB29 SB30 TP1 TP4 TP5 TP6 TP35 U3
component class "Current measurments": JP1 P14 R15 SB19
component class Flash: C58 SB23 SB24 U4
net class TRACE: P2.06 P2.07 P2.08 P2.09 P2.10
component class "Levelshifters and switches": C78 C79 C80 C81 C82 C83 C84 C85 C86 C87 C88 C89 Q9 R19 R36 R37 R38 R39 R40 R41 R42 R43 R44 R51 U5 U6 U7 U8 U12 U13 U14
component class pca10184_top_level: SB25 SB26
component class Misc: C56 C57 C58 LD1 LD2 LD3 LD4 Q4 Q5 Q6 Q7 R25 R26 R27 R28 R29 R30 R31 R32 R33 R34 R35 SB22 SB23 SB24 SW1 SW2 SW3 SW4 SW6 U4
component class nRF54LM20: C1 C2 C3 C4 C5 C6 C7 C8 C10 C11 C12 C13 C14 C76 FB1 FB2 J1 L1 L2 L3 L4 L5 R1 R2 R3 R4 SB1 SB2 SB3 SB4 TP3 TP11 TP12 U1 X1 X2
differential pair class nRF54: DBGR DBGR_CON J2 J3 nRF54 nRF54_CON
differential pair class IMCU: D1 D2 DBGR_U2 USB_DBGR USB_nRF54
net class USB: D1_N D1_P D2_N D2_P DBGR_N DBGR_P nRF54_N nRF54_P USB_DBGR_N USB_DBGR_P USB_nRF54_D+ USB_nRF54_D-
net class UART1: UART1_CTRL UART1_CTS_DBGR UART1_HWFC UART1_RTS_DBGR UART1_RxD_DBGR UART1_TxD_DBGR
net class UART0: UART0_CTRL UART0_CTS_DBGR UART0_HWFC UART0_RTS_DBGR UART0_RxD_DBGR UART0_TxD_DBGR
component class "Power supply": C33 C34 C35 C36 C37 C38 C39 C40 C41 C42 C43 C44 C45 C46 C47 C48 C49 C50 C51 C52 C54 C55 C59 C60 JP1 L6 L7 P14 P16 Q2 Q3 Q8 R14 R15 R16 R17 R18 R20 R21 R22 R23 R24 R52 R53 R54 R55 SB6 SB17 SB18 SB19 SB20 SB21 SB27 SB28 SB29 SB30 SB31 SW5 TP1 TP2 TP4 TP5 TP6 TP14 TP15 TP16 TP17 TP18 TP19 TP20 TP35 U3 U9
component class Mechanical: Fid1 Fid2 Fid3 H1 H2 H3 H4 H5 H6 LABEL1 LOGO1 LOGO3
component class Debugger: C15 C16 C17 C18 C19 C20 C21 C22 C23 C24 C25 C26 C27 C28 C29 C30 C31 C32 C77 FB5 J2 LD5 Q1 R5 R6 R7 R8 R9 R10 R11 R12 R13 R47 R48 R49 R50 R57 TP7 TP8 TP9 TP10 U2 X3
component class Connectors: C63 C64 C65 C66 C67 C68 C69 C70 C71 C72 C73 C74 D1 D2 FB3 FB4 J3 J4 J5 L8 L9 P1 P2 P3 P4 P5 P6 P7 P8 P9 P10 P11 P12 P13 P17 P18 P30 P31 P32 P34 P35 R45 R46 TP21 TP22 TP23 TP24 TP25 TP26 TP27 TP28
differential pair USB_nRF54: +USB_nRF54_D+ -USB_nRF54_D-
differential pair USB_DBGR: +USB_DBGR_P -USB_DBGR_N
differential pair DBGR: +DBGR_P -DBGR_N
differential pair nRF54: +nRF54_P -nRF54_N
differential pair D2: +D2_P -D2_N
differential pair D1: +D1_P -D1_N
differential pair NFC: +NFC_P -NFC_N

## Components (designator, comment, footprint, x,y, rotation, side; value= is the part's Value field where it differs from the comment)
C1 "100nF" CAPC0603X03L_C 128.903,34.877 r0 top
C2 "100nF" CAPC0603X03L_C 122.674,34.751 r90 top
C3 "1.2pF" CAPC0603X03L_C 129.688,33.976 r270 top
C4 "10µF" CAPC1005X04L 127.552,30.702 r90 top
C5 "100nF" CAPC0603X03L_C 124.046,31.414 r180 top
C6 "4.7µF" CAPC0603X03L_C 125.494,31.312 r0 top
C7 "2.2µF" CAPC0603X03L_C 124.529,29.864 r90 top
C8 "1.0pF" CAPC0603X03L_C 129.159,32.611 r270 top
C10 "2.2µF" CAPC0603X03L_C 125.274,37.851 r270 top
C11 "4.7µF" CAPC1005X04L 124.568,37.601 r270 top
C12 "1.5pF" CAPC0603X03L_C 131.32,33.976 r90 top
C13 "0.3pF" CAPC0603X03L_C 132.98,34.161 r270 top
C14 "2.2µF" CAPC0603X03L_C 129.715,32.611 r270 top
C15 "100nF" CAPC0603X03L_C 13.054,18.854 r180 top
C16 "100nF" CAPC0603X03L_C 15.35,14.8 r270 top
C17 "100nF" CAPC0603X03L_C 18.047,14.8 r270 top
C18 "1.0µF" CAPC1005X04L 20.325,25.55 r90 top
C19 "1.0µF" CAPC1005X04L 22.575,24.725 r0 top
C20 "2.2nF" CAPC0603X03L_C 24.25,22.325 r90 top
C21 "100nF" CAPC0603X03L_C 20.85,14.8 r270 top
C22 "100nF" CAPC0603X03L_C 23.858,20.067 r0 top
C23 "100nF" CAPC0603X03L_C 23.7,22.325 r270 top
C24 "100nF" CAPC0603X03L_C 23.953,24.091 r0 top
C25 "1.0µF" CAPC1005X04L 18.648,25.63 r0 top
C26 "2.2µF" CAPC1608X06L 13.05,20.443 r90 top
C27 "4.7µF" CAPC1608X06L 13.297,28.121 r180 top
C28 "100nF" CAPC0603X03L_C 13.687,27.31 r180 top
C29 "4.7µF" CAPC1608X06L 15.1,25.8 r90 top
C30 "4.7µF" CAPC1608X06L 16.2,25.8 r90 top
C31 "100nF" CAPC0603X03L_C 21.069,23.975 r0 top
C32 "1.0µF" CAPC1005X04L 18.25,24.78 r0 top
C33 "10µF" CAPC1608X06L 18.451,42.752 r90 top
C34 "4.7µF" CAPC1005X04L_C2 11.55,47 r0 top
C35 "100nF" CAPC0603X03L_C 11.55,46.325 r0 top
C36 "4.7µF" CAPC1005X04L_C2 13.725,47.2 r0 top
C37 "100nF" CAPC0603X03L_C 13.75,47.899 r0 top
C38 "4.7µF" CAPC1005X04L_C2 12.968,53.1 r90 top
C39 "1.0µF" CAPC1005X04L 13.731,45.475 r0 top
C40 "10µF" CAPC1608X06L 23.327,46.672 r90 top
C41 "10µF" CAPC1608X06L 23.327,49.222 r270 top
C42 "1.0nF" CAPC0603X03L_C 24.512,48.347 r180 top
C43 "1.0nF" CAPC0603X03L_C 24.512,47.547 r180 top
C44 "10µF" CAPC1608X06L 13.6,48.725 r0 top
C45 "10µF" CAPC1608X06L 13.6,49.85 r0 top
C46 "10µF" CAPC1608X06L 22.65,44.75 r180 top
C47 "100nF" CAPC0603X03L_C 26.163,47.547 r0 top
C48 "10µF" CAPC1608X06L 23.327,51.96 r90 top
C49 "100nF" CAPC0603X03L_C 26.167,48.342 r0 top
C50 "10µF" CAPC1608X06L 19.625,42.752 r90 top
C51 "10µF" CAPC1608X06L 17.225,42.752 r90 top
C52 "10µF" CAPC1608X06L 20.825,42.752 r90 top
C54 "100nF" CAPC0603X03L_C 19.275,51.85 r90 top
C55 "4.7µF" CAPC1608X06L 8.35,51 r90 top
C56 "300pF" CAPC1005X04L 142.9,54.7 r0 top
C57 "300pF" CAPC1005X04L 140.9,54.7 r0 top
C58 "100nF" CAPC0603X03L_C 97.519,26.364 r0 top
C59 "100nF" CAPC0603X03L_C 37.477,45.532 r270 top
C60 "100nF" CAPC0603X03L_C 32.665,44.201 r90 top
C61 "100nF" CAPC0603X03L_C 105.423,31.926 r90 top
C62 "100nF" CAPC0603X03L_C 94.168,27.266 r180 top
C63 "100nF" CAPC0603X03L_C 10.725,44.275 r180 top
C64 "1.0µF" CAPC1005X04L 10.2,41.8 r180 top
C65 "10nF" CAPC0603X03L_C 11.2,43.1 r180 top
C66 "100nF" CAPC0603X03L_C 11.2,42.52 r180 top
C67 "10nF" CAPC1005X04L 2.256,33.328 r270 top
C68 "10nF" CAPC1005X04L 3.17,33.328 r270 top
C69 "100nF" CAPC0603X03L_C 11,29.4 r180 top
C70 "1.0µF" CAPC1005X04L 10.195,26.568 r180 top
C71 "10nF" CAPC0603X03L_C 10.139,25.42 r180 top
C72 "100nF" CAPC0603X03L_C 10.139,25.927 r180 top
C73 "10nF" CAPC1005X04L 2.256,30.175 r90 top
C74 "10nF" CAPC1005X04L 3.17,30.175 r90 top
C76 "1.0pF" CAPC0603X03L_C 136.773,34.487 r270 top
C77 "100nF" CAPC0603X03L_C 14.35,22.775 r90 top
C78 "100nF" CAPC0603X03L_C 34.27,14.532 r90 top
C79 "100nF" CAPC0603X03L_C 29.703,13.515 r180 top
C80 "100nF" CAPC0603X03L_C 31.554,13.511 r0 top
C81 "100nF" CAPC0603X03L_C 34.27,19.659 r90 top
C82 "100nF" CAPC0603X03L_C 29.703,18.654 r180 top
C83 "100nF" CAPC0603X03L_C 31.554,18.651 r0 top
C84 "100nF" CAPC0603X03L_C 33.985,24.396 r180 top
C85 "100nF" CAPC0603X03L_C 29.704,23.655 r180 top
C86 "100nF" CAPC0603X03L_C 31.554,23.655 r0 top
C87 "1.0µF" CAPC1005X04L 33.779,25.425 r0 top
C88 "100nF" CAPC0603X03L_C 18.452,28.335 r90 top
C89 "100nF" CAPC0603X03L_C 18.183,31.151 r90 top
D1 "PRTR5V0U2F,115" SON50P100X50-6N 9.6,39.37 r180 top
D2 "PRTR5V0U2F,115" SON50P100X50-6N 9.6,24.134 r180 top
FB1 "120R/0.2A" INDC0603X03L_C 125.088,29.864 r90 top
FB2 "15nH" INDC0603X03L_C 129.159,31.498 r270 top
FB3 "120R/3A" INDC1608X06L 9.635,43.472 r90 top
FB4 "120R/3A" INDC1608X06L 9.787,28.241 r90 top
FB5 "120R/100MHz" INDC1005X04L_C2 14.982,28.524 r90 top
Fid1 "Fiducial mark" Fiducial 3.175,3.175 r0 top value=N.A.
Fid2 "Fiducial mark" Fiducial 133.35,2.54 r0 top value=N.A.
Fid3 "Fiducial mark" Fiducial 141.09,61.491 r0 top value=N.A.
H1 "MountingHole_NPTH" MountingHole_3.2_M3 12.6,58.5 r0 top value=MountingHole_3.2_M3
H2 "MountingHole_NPTH" MountingHole_3.2_M3 44,58.5 r0 top locked value=MountingHole_3.2_M3
H3 "MountingHole_NPTH" MountingHole_3.2_M3 113.1,58.5 r0 top locked value=MountingHole_3.2_M3
H4 "MountingHole_NPTH" MountingHole_3.2_M3 8,5 r0 top locked value=MountingHole_3.2_M3
H5 "MountingHole_NPTH" MountingHole_3.2_M3 44,5 r0 top value=MountingHole_3.2_M3
H6 "MountingHole_NPTH" MountingHole_3.2_M3 106,5 r0 top locked value=MountingHole_3.2_M3
J1 "MM8130-2600" COAXIAL-SWF 134.837,33.712 r90 top
J2 "TC2050-IDC" TC2050-IDC-NLFP 24.5,2.165 r0 top locked
J3 "USB-C 2.0" SD-80259-001 5.1,39.37 r270 top
J4 "USB-C 2.0" SD-80259-001 5.1,24.134 r270 top
J5 "FPC 0.5mm RA SMD" FPC_05P-0.5mm-RA-SMD 142.9,56 r180 top
JP1 "Shunt 2.54mm" Shunt_2.54mm_Vertical 33.012,59.765 r0 top
L1 "4.7µH" INDC1608X06L 126.586,30.448 r270 top
L2 "3.6nH" INDC0603X03L_C 128.872,33.702 r0 top
L3 "4.7nH" INDC0603X03L_C 130.505,33.7 r0 top
L4 "3.3nH" INDC0603X03L_C 132.134,33.694 r0 top
L5 "1.0nH" INDC0603X03L_C 128.636,32.611 r90 top
L6 "2.2µH" INDC2016X10N 25.125,50.325 r270 top
L7 "2.2µH" INDC2016X10N 25.612,46.047 r180 top
L8 "DLM0NSM900HY2D" CMC0806X05N 12.5,39.37 r270 top
L9 "DLM0NSM900HY2D" CMC0806X05N 12.5,24.134 r270 top
LABEL1 "12x12mm" LabelSilk_12x12 78.097,19.153 r0 top
LD1 "L0603G" LED_0603_G 119.2,48.1 r0 top
LD2 "L0603G" LED_0603_G 125.5,48.1 r0 top
LD3 "L0603G" LED_0603_G 119.2,44.4 r0 top
LD4 "L0603G" LED_0603_G 125.5,44.4 r0 top
LD5 "L0603G" LED_0603_G 25.8,10.65 r0 top
LOGO1 "WEE Symbol" WEE_3x4.5mm 5.8,56.7 r90 bottom
LOGO3 "Segger Logo S" SEGGER_LOGO_S 16,6.5 r90 bottom
P1 "Pin Hdr 2x10" HDR_2x10-SMD 63.05,50.8 r0 top locked
P2 "Pin Hdr 2x10" HDR_2x10-SMD 63.05,38.1 r0 top locked
P3 "Pin Hdr 2x10" HDR_2x10-SMD 63.05,25.4 r0 top locked
P4 "Pin Hdr 2x10" HDR_2x10-SMD 101.785,50.8 r0 top locked
P5 "Pin Hdr 2x10" HDR_2x10-SMD 101.785,38.1 r0 top locked
P6 "Pin Header 2x2 SMD" HDR_2x2-SMD 44,50.8 r0 top locked
P7 "Pin Header 2x2 SMD" HDR_2x2-SMD 44,38.1 r0 top locked
P8 "Pin Header 2x2 SMD" HDR_2x2-SMD 44,25.4 r0 top locked
P9 "Pin Header 2x2 SMD" HDR_2x2-SMD 82.735,50.8 r0 top locked
P10 "Pin Header 2x2 SMD" HDR_2x2-SMD 82.735,38.1 r0 top locked
P11 "Pin Header 2x5, 1.27mm" HDR_2x5-SMD-1.27mm-K 120.247,58.726 r0 top locked
P12 "Pin Header 2x10, 1.27mm" HDR_2x10-SMD-1.27mm-NC 123.422,58.726 r0 top locked
P13 "Pin Header 2x5, 1.27mm" HDR_2x5-SMD-1.27mm-K 15.827,3.825 r0 top
P14 "Pin List 1x3" LIST_1x3_SMD 31.753,59.696 r0 top
P16 "Pin List 1x3" LIST_1x3_SMD 18.935,59.696 r0 top
P17 "Pin Hdr 2x13" HDR_2x13-SMD 66.86,12.7 r0 top locked
P18 "Pin Header 2x2 SMD" HDR_2x2-SMD 44,12.7 r0 top locked
Q1 "RV2C010UNT2L" DFN65P100X40-3L 23.772,10.65 r0 top
Q2 "MCM2301-TP" DFN65P200X200X80_HS-6N 6.22,49.411 r90 top
Q3 "MCM2301-TP" DFN65P200X200X80_HS-6N 2.67,49.411 r90 top
Q4 "RV2C010UNT2L" DFN65P100X40-3L 117.1,48.1 r0 top
Q5 "RV2C010UNT2L" DFN65P100X40-3L 123.4,48.1 r0 top
Q6 "RV2C010UNT2L" DFN65P100X40-3L 117.1,44.4 r0 top
Q7 "RV2C010UNT2L" DFN65P100X40-3L 123.4,44.4 r0 top
Q8 "PBSS4330PA" DFN105P200X65-3N_v2 31.568,46.466 r180 top
Q9 "RV2C010UNT2L" DFN65P100X40-3L 17.66,30.176 r0 top
R1 "2R2" RESC1608X06L 123.506,38.398 r90 top
R2 "200R" RESC0603X03L_C 125.874,37.851 r270 top
R3 "N.C." RESC1005X04L_NC 143.4,53.3 r270 top
R4 "N.C." RESC1005X04L_NC 140.4,53.3 r270 top
R5 "560R" RESC0603X03L_C 27.718,10.65 r0 top
R6 "150R" RESC0603X03L_C 19.007,28.335 r90 top
R7 "100k" RESC0603X03L_C 23.85,18.275 r0 top
R8 "47R" RESC0603X03L_C 23.85,20.675 r0 top
R9 "100k" RESC0603X03L_C 16.8,12.9 r90 top
R10 "100k" RESC0603X03L_C 17.5,12.7 r90 top
R11 "2R2" RESC1608X06L 13.972,25.8 r270 top
R12 "150R" RESC0603X03L_C 19.567,28.337 r90 top
R13 "150R" RESC0603X03L_C 20.128,28.338 r90 top
R14 "0R" RESC1005X04L 13.725,46.325 r0 top
R15 "10R" RESC1005X04L 32.287,52.709 r180 top
R16 "0R" RESC1005X04L 12.1,53.1 r90 top
R17 "47k" RESC0603X03L_C 16.4,52.2 r90 top
R18 "4k7" RESC0603X03L_C 17.2,52.2 r90 top
R19 "100k" RESC0603X03L_C 34.797,14.532 r270 top
R20 "1M0" RESC0603X03L_C 5.57,47.106 r270 top
R21 "10k" RESC0603X03L_C 6.245,47.106 r270 top
R22 "10k" RESC0603X03L_C 2.675,47.106 r90 top
R23 "100k" RESC0603X03L_C 3.32,47.106 r270 top
R24 "1M0" RESC0603X03L_C 2.02,47.106 r270 top
R25 "220R" RESC0603X03L_C 121,48.1 r0 top
R26 "220R" RESC0603X03L_C 127.3,48.1 r0 top
R27 "220R" RESC0603X03L_C 121,44.4 r0 top
R28 "220R" RESC0603X03L_C 127.3,44.4 r0 top
R29 "1M0" RESC0603X03L_C 122.4,48.1 r270 top
R30 "1M0" RESC0603X03L_C 116.1,44.4 r270 top
R31 "1M0" RESC0603X03L_C 122.4,44.4 r270 top
R32 "1M0" RESC0603X03L_C 116.1,48.1 r270 top
R33 "0R" RESC1005X04L 142.4,53.3 r90 top
R34 "0R" RESC1005X04L 141.4,53.3 r90 top
R35 "100k" RESC0603X03L_C 15.76,13.341 r0 top
R36 "100k" RESC0603X03L_C 32.956,12.891 r270 top
R37 "100k" RESC0603X03L_C 34.794,19.659 r270 top
R38 "100k" RESC0603X03L_C 32.956,18.032 r270 top
R39 "100k" RESC0603X03L_C 17.601,28.904 r270 top
R40 "100k" RESC0603X03L_C 32.956,23.052 r270 top
R41 "1M0" RESC0603X03L_C 17.305,31.151 r270 top
R42 "0R" RESC1005X04L 37.335,48.393 r0 top
R43 "0R" RESC1005X04L 37.335,47.531 r0 top
R44 "0R" RESC1005X04L 39.242,48.393 r180 top
R45 "5k1" RESC0603X03L_C 10.15,37.55 r180 top
R46 "5k1" RESC0603X03L_C 10.15,36.97 r180 top
R47 "150R" RESC0603X03L_C 20.689,28.338 r90 top
R48 "150R" RESC0603X03L_C 28.893,22.731 r0 top
R49 "150R" RESC0603X03L_C 28.893,22.174 r0 top
R50 "150R" RESC0603X03L_C 28.893,21.617 r0 top
R51 "0R" RESC1005X04L 39.242,47.531 r180 top
R52 "0R" RESC0603X03L_C 33.514,47.693 r0 top
R53 "10k" RESC0603X03L_C 34.359,47.402 r90 top
R54 "0R" RESC0603X03L_C 33.514,47.116 r180 top
R55 "33k" RESC0603X03L_C 31.832,43.916 r0 top
R56 "100k" RESC0603X03L_C 95.266,27.262 r0 top
R57 "150R" RESC0603X03L_C 28.893,21.06 r0 top
SB1 "Solderbridge" Solderbridge_Shorted 124.172,26 r90 top net-tie
SB2 "Solderbridge" Solderbridge_Shorted 122.772,26 r90 top net-tie
SB3 "Solderbridge" Solderbridge 124.172,24.3 r270 top
SB4 "Solderbridge" Solderbridge 122.772,24.3 r270 top
SB5 "Solderbridge" Solderbridge_Shorted 94.981,26.202 r90 top net-tie
SB6 "Solderbridge" Solderbridge_Shorted_Power 1.057,47.077 r270 top net-tie
SB17 "Solderbridge" Solderbridge 10.65,51.55 r0 top
SB18 "Solderbridge" Solderbridge_Shorted_Power 13.121,51.575 r0 top net-tie
SB19 "Solderbridge" Solderbridge 34.5,52.75 r180 top
SB20 "Solderbridge" Solderbridge 34.5,51.25 r180 top
SB21 "Solderbridge" Solderbridge 34.5,49.75 r180 top
SB22 "Solderbridge" Solderbridge 12.35,12.55 r0 top
SB23 "Solderbridge" Solderbridge_Shorted 96.891,25.338 r0 top net-tie
SB24 "Solderbridge" Solderbridge 96.891,23.738 r0 top
SB25 "Solderbridge" Solderbridge 12.35,11.05 r180 top
SB26 "Solderbridge" Solderbridge_Shorted 12.35,9.55 r0 top net-tie
SB27 "Solderbridge" Solderbridge 15.67,43.2 r90 top
SB28 "Solderbridge" Solderbridge_Shorted 15.67,43.9 r270 top net-tie
SB29 "Solderbridge" Solderbridge_Shorted 15.67,41.8 r90 top net-tie
SB30 "Solderbridge" Solderbridge 15.67,42.5 r270 top
SB31 "Solderbridge" Solderbridge_Shorted_Power 21.5,55.4 r180 top net-tie
SW1 "PB SW" Switch-PB-6.2x6.3mm-SMD 117.323,15.85 r0 top locked
SW2 "PB SW" Switch-PB-6.2x6.3mm-SMD 127.584,15.85 r0 top locked
SW3 "PB SW" Switch-PB-6.2x6.3mm-SMD 117.323,6.35 r0 top locked
SW4 "PB SW" Switch-PB-6.2x6.3mm-SMD 127.584,6.35 r0 top locked
SW5 "Switch" JS102011JAQN 4.7,57.9 r270 top
SW6 "PB SW" Switch-PB-6.2x6.3mm-SMD 6.096,11.637 r180 top
TP1 "Ø1.5mm,SMD" TP_SMD_D1.5mm 27.889,54.915 r90 bottom
TP2 "Ø1.5mm,SMD" TP_SMD_D1.5mm 36.567,52.829 r0 top
TP3 "Ø0.7mm,SMD" TP_SMD_D0.7mm 126.58,28.507 r0 top
TP4 "Ø1.5mm,SMD" TP_SMD_D1.5mm 23.368,58.039 r180 bottom
TP5 "Ø1.5mm,SMD" TP_SMD_D1.5mm 14.529,54.306 r180 bottom
TP6 "Ø1.5mm,SMD" TP_SMD_D1.5mm 22.073,54.814 r180 bottom
TP7 "Ø1.5mm,SMD" TP_SMD_D1.5mm 29.616,4.115 r180 bottom
TP8 "Ø1.5mm,SMD" TP_SMD_D1.5mm 23.616,4.115 r180 bottom
TP9 "Ø1.5mm,SMD" TP_SMD_D1.5mm 20.616,4.115 r180 bottom
TP10 "Ø1.5mm,SMD" TP_SMD_D1.5mm 26.616,4.115 r90 bottom
TP11 "Ø0.7mm,SMD" TP_SMD_D0.7mm 123.305,30.145 r0 top
TP12 "Ø0.7mm,SMD" TP_SMD_D0.7mm 124.848,39.48 r0 top
TP13 "Ø0.7mm,SMD" TP_SMD_D0.7mm 91.892,27.335 r270 top
TP14 "Ø1.5mm,SMD" TP_SMD_D1.5mm 4.012,52.285 r90 bottom
TP15 "TP" S1751 36.17,5.192 r270 top
TP16 "Ø1.5mm,SMD" TP_SMD_D1.5mm 11.709,48.921 r180 bottom
TP17 "Ø1.5mm,SMD" TP_SMD_D1.5mm 116.116,25.302 r0 top
TP18 "Ø1.5mm,SMD" TP_SMD_D1.5mm 45.491,13.056 r180 bottom
TP19 "Ø1.5mm,SMD" TP_SMD_D1.5mm 9.246,31.75 r180 bottom
TP20 "Ø1.5mm,SMD" TP_SMD_D1.5mm 36.17,49.2 r180 bottom
TP21 "Ø1.5mm,SMD" TP_SMD_D1.5mm 13.259,38.845 r90 bottom
TP22 "Ø1.5mm,SMD" TP_SMD_D1.5mm 10.236,38.353 r90 bottom
TP23 "Ø1.5mm,SMD" TP_SMD_D1.5mm 10.236,41.353 r90 bottom
TP24 "Ø1.5mm,SMD" TP_SMD_D1.5mm 13.259,23.572 r90 bottom
TP25 "Ø1.5mm,SMD" TP_SMD_D1.5mm 10.236,26.115 r90 bottom
TP26 "Ø1.5mm,SMD" TP_SMD_D1.5mm 143.376,51.885 r90 bottom
TP27 "Ø1.5mm,SMD" TP_SMD_D1.5mm 10.226,23.115 r90 bottom
TP28 "Ø1.5mm,SMD" TP_SMD_D1.5mm 140.376,51.885 r90 bottom
TP29 "Ø0.7mm,SMD" TP_SMD_D0.7mm 91.892,29.464 r270 top
TP30 "Ø0.7mm,SMD" TP_SMD_D0.7mm 91.876,31.593 r270 top
TP31 "Ø0.7mm,SMD" TP_SMD_D0.7mm 102.808,26.146 r0 top
TP32 "Ø0.7mm,SMD" TP_SMD_D0.7mm 104.938,26.146 r0 top
TP33 "Ø0.7mm,SMD" TP_SMD_D0.7mm 107.067,26.146 r0 top
TP34 "Ø0.7mm,SMD" TP_SMD_D0.7mm 93.221,26.216 r0 top
TP35 "Ø0.7mm,SMD" TP_SMD_D0.7mm 20.761,53.497 r0 top
U1 "nRF54LM20_PAAA" BGA98C35P10X10_367X385X86 126.195,33.875 r180 top locked
U2 "nRF5340-QKAA" AQFN40P700X700X85_HS-99N 19.05,19.675 r0 top
U3 "nPM1300-QEAA" Nordic_QFN50P500X500X90-33N 19.025,48.225 r180 top
U4 "MX25R6435F" SON127P600X80_HS-9N 100.004,29.488 r180 top
U5 "TMUX1511" XQFN40P180X260X50-16N 34.87,12.006 r0 top
U6 "TMUX1511" XQFN40P180X260X50-16N 34.87,17.146 r0 top
U7 "TMUX1511" XQFN40P180X260X50-16N 34.87,22.167 r0 top
U8 "TXB0104" QFN12P40_170X200X55L50X20 19.664,30.176 r90 top
U9 "TLV271" SOT95P280X145-5N 35.083,44.866 r0 top
U12 "TXB0104" QFN12P40_170X200X55L50X20 30.629,12.006 r0 top
U13 "TXB0104" QFN12P40_170X200X55L50X20 30.629,17.146 r0 top
U14 "TXB0104" QFN12P40_170X200X55L50X20 30.629,22.167 r0 top
U15 "TMUX1574" XQFN40P180X260X50-16N 94.75,29.483 r180 top
U16 "TMUX1574" XQFN40P180X260X50-16N 105.223,29.495 r0 top
X1 "32MHz" BT-XTAL_2016 130.681,30.771 r90 top
X2 "32.768kHz" XTAL_2012 124.153,28.074 r0 top
X3 "32MHz" BT-XTAL_2016 26.175,23.53 r90 top

## Footprints (in the part's own frame and the unit in brackets; to place one, negate y for a bottom-side part, rotate by r counter-clockwise, add the part's x,y. Pads: shape width x height; smd on the part's side, far side on the other; paste and mask are expansions set on the pad)
AQFN40P700X700X85_HS-99N [mm] "AQFN, 98-Leads, Body 7.00x7.00mm, Pitch 0.40mm, Thermal Pad 5.4x5.0mm, IPC Medium Density"
  rect 5.4x5 smd paste-5: 104(0.2,0)
  round 0.4 smd paste+0.012: A1(-3.2,3.2) A31(3.2,3.2) AL1(-3.2,-3.2) AL31(3.2,-3.2)
  round 0.225 smd paste+0.012: A5(-2.2,3.2) A13(-0.6,3.2) A15(-0.2,3.2) A17(0.2,3.2) A19(0.6,3.2) A21(1,3.2) A23(1.4,3.2) A25(1.8,3.2) A27(2.2,3.2) AA1(-3.2,-1) AA31(3.2,-1) AB2(-2.8,-1.2) AC1(-3.2,-1.4) AC31(3.2,-1.4) AD2(-2.8,-1.6) AE1(-3.2,-1.8) AE31(3.2,-1.8) AF2(-2.8,-2) AG1(-3.2,-2.2) AG31(3.2,-2.2) AH2(-2.8,-2.4) AJ1(-3.2,-2.6) AJ31(3.2,-2.6) AK2(-2.8,-2.8) AK4(-2.4,-2.8) AK6(-2,-2.8) AK8(-1.6,-2.8) AK10(-1.2,-2.8) AK12(-0.8,-2.8) AK14(-0.4,-2.8) AK16(0,-2.8) AK18(0.4,-2.8) AK20(0.8,-2.8) AK22(1.2,-2.8) AK24(1.6,-2.8) AK26(2,-2.8) AK28(2.4,-2.8) AK30(2.8,-2.8) AL3(-2.6,-3.2) AL5(-2.2,-3.2) AL7(-1.8,-3.2) AL9(-1.4,-3.2) AL11(-1,-3.2) AL13(-0.6,-3.2) AL15(-0.2,-3.2) AL17(0.2,-3.2) AL19(0.6,-3.2) AL21(1,-3.2) AL23(1.4,-3.2) AL25(1.8,-3.2) AL27(2.2,-3.2) AL29(2.6,-3.2) B2(-2.8,2.8) B4(-2.4,2.8) B6(-2,2.8) B8(-1.6,2.8) B10(-1.2,2.8) B12(-0.8,2.8) B14(-0.4,2.8) B16(0,2.8) B18(0.4,2.8) B20(0.8,2.8) B22(1.2,2.8) B24(1.6,2.8) B26(2,2.8) B28(2.4,2.8) B30(2.8,2.8) C1(-3.2,2.6) C31(3.2,2.6) D2(-2.8,2.4) E1(-3.2,2.2) E31(3.2,2.2) F2(-2.8,2) G1(-3.2,1.8) G31(3.2,1.8) H2(-2.8,1.6) J1(-3.2,1.4) J31(3.2,1.4) K2(-2.8,1.2) L1(-3.2,1) L31(3.2,1) M2(-2.8,0.8) N1(-3.2,0.6) N31(3.2,0.6) P2(-2.8,0.4) R1(-3.2,0.2) R31(3.2,0.2) T2(-2.8,0) U1(-3.2,-0.2) U31(3.2,-0.2) V2(-2.8,-0.4) W1(-3.2,-0.6) W31(3.2,-0.6) Y2(-2.8,-0.8)
  rrect15% 1.1x1 on Top Paste: ""(-1.75,-1.8) ""(-1.75,-0.6) ""(-1.75,0.6) ""(-1.75,1.8) ""(-0.45,-1.8) ""(-0.45,-0.6) ""(-0.45,0.6) ""(-0.45,1.8) ""(0.85,-1.8) ""(0.85,-0.6) ""(0.85,0.6) ""(0.85,1.8) ""(2.15,-1.8) ""(2.15,-0.6) ""(2.15,0.6) ""(2.15,1.8)
  silkscreen extent -4.17,3.23 -3.97,3.47, body extent -3.5,-3.5 3.5,3.5, height 0.85
BGA98C35P10X10_367X385X86 [mm] "BGA, 98-Leads, Body 3.67x3.85mmx0.86mm, Pitch 0.35mm"
  round 0.2 smd: A1(-1.575,1.575) A2(-1.225,1.575) A3(-0.875,1.575) A4(-0.525,1.575) A5(-0.175,1.575) A6(0.175,1.575) A7(0.525,1.575) A8(0.875,1.575) A9(1.225,1.575) A10(1.575,1.575) B1(-1.575,1.225) B2(-1.225,1.225) B3(-0.875,1.225) B4(-0.525,1.225) B5(-0.175,1.225) B6(0.175,1.225) B7(0.525,1.225) B8(0.875,1.225) B9(1.225,1.225) B10(1.575,1.225) C1(-1.575,0.875) C2(-1.225,0.875) C3(-0.875,0.875) C4(-0.525,0.875) C5(-0.175,0.875) C6(0.175,0.875) C7(0.525,0.875) C8(0.875,0.875) C9(1.225,0.875) C10(1.575,0.875) D1(-1.575,0.525) D2(-1.225,0.525) D4(-0.525,0.525) D5(-0.175,0.525) D6(0.175,0.525) D7(0.525,0.525) D8(0.875,0.525) D9(1.225,0.525) D10(1.575,0.525) E1(-1.575,0.175) E3(-0.875,0.175) E4(-0.525,0.175) E5(-0.175,0.175) E6(0.175,0.175) E7(0.525,0.175) E8(0.875,0.175) E9(1.225,0.175) E10(1.575,0.175) F1(-1.575,-0.175) F2(-1.225,-0.175) F3(-0.875,-0.175) F4(-0.525,-0.175) F5(-0.175,-0.175) F6(0.175,-0.175) F7(0.525,-0.175) F8(0.875,-0.175) F9(1.225,-0.175) F10(1.575,-0.175) G1(-1.575,-0.525) G2(-1.225,-0.525) G3(-0.875,-0.525) G4(-0.525,-0.525) G5(-0.175,-0.525) G6(0.175,-0.525) G7(0.525,-0.525) G8(0.875,-0.525) G9(1.225,-0.525) G10(1.575,-0.525) H1(-1.575,-0.875) H2(-1.225,-0.875) H3(-0.875,-0.875) H4(-0.525,-0.875) H5(-0.175,-0.875) H6(0.175,-0.875) H7(0.525,-0.875) H8(0.875,-0.875) H9(1.225,-0.875) H10(1.575,-0.875) J1(-1.575,-1.225) J2(-1.225,-1.225) J3(-0.875,-1.225) J4(-0.525,-1.225) J5(-0.175,-1.225) J6(0.175,-1.225) J7(0.525,-1.225) J8(0.875,-1.225) J9(1.225,-1.225) J10(1.575,-1.225) K1(-1.575,-1.575) K2(-1.225,-1.575) K3(-0.875,-1.575) K4(-0.525,-1.575) K5(-0.175,-1.575) K6(0.175,-1.575) K7(0.525,-1.575) K8(0.875,-1.575) K9(1.225,-1.575) K10(1.575,-1.575)
  Top Side keep-out region: -1.125,0.775 -0.625,0.775 -0.625,0.275 -1.125,0.275
  Top Side keep-out region: -1.475,0.425 -0.975,0.425 -0.975,-0.075 -1.475,-0.075
  body extent -1.84,-1.92 1.84,1.92, height 0.86
BT-XTAL_2016 [mm] "Crystal 2.0 x 1.6 mm"
  rect 0.95x0.85 smd: 1(-0.725,-0.575) 2(0.725,-0.575) 3(0.725,0.575) 4(-0.725,0.575)
  body extent -1.05,-0.85 1.05,0.85, height 0.56
CAPC0603X03L_C [mm] "Chip Capacitor, 2-Leads, Body 0.6x0.3mm, IPC High Density"
  rect 0.27x0.3 smd mask+0.05: 1(-0.285,0) 2(0.285,0)
  body extent -0.3,-0.15 0.3,0.15, height 0.3
CAPC1005X04L [mm] "Chip Capacitor, 2-Leads, Body 1.0x0.5mm, IPC High Density"
  rect 0.6x0.5 smd: 1(-0.5,0) 2(0.5,0)
  body extent -0.5,-0.25 0.5,0.25, height 0.5
CAPC1005X04L_C2 [mm] "Chip Capacitor, 2-Leads, Body 1.0x0.5mm, IPC High Density"
  rect 0.425x0.5 smd mask+0.05: 1(-0.463,0) 2(0.463,0)
  body extent -0.5,-0.25 0.5,0.25, height 0.5
CAPC1608X06L [mm] "Chip Capacitor, 2-Leads, Body 1.6x0.8mm, IPC High Density"
  rect 0.75x0.8 smd: 1(-0.675,0) 2(0.675,0)
  body extent -0.8,-0.4 0.8,0.4, height 0.8
CMC0806X05N [mm]
  rect 0.3x0.3 smd mask+0.05: 1(-0.25,-0.3) 2(0.25,-0.3) 3(0.25,0.3) 4(-0.25,0.3)
  silkscreen extent -0.67,-0.7 -0.58,-0.6, body extent -0.42,-0.32 0.43,0.33, height 0.52
COAXIAL-SWF [mm]
  rect 0.5x0.58 smd: 1(0,1.16) 3(0,-1.16)
  rect 0.75x0.8 smd: 2(-1.025,-0.95) 2(-1.025,0.95) 2(1.025,-0.95) 2(1.025,0.95)
  Top Side pour cut-out: -0.65,0.55 0.65,0.55 0.65,1.35 -0.65,1.35
  Top Side pour cut-out: 0.65,-0.55 -0.65,-0.55 -0.65,-1.35 0.65,-1.35
  silkscreen extent -1.25,-0.22 1.25,0.22, body extent -1.26,-1.3 1.26,1.3, height 1.55
DFN65P100X40-3L [mm] "DFN, 3-Leads, Body 0.60x1.00mm, Pitch 0.65mm, IPC High Density"
  rect 0.4x0.25 smd mask+0.05: 1(-0.35,0.225) 2(-0.35,-0.225)
  rect 0.4x0.7 smd mask+0.065: 3(0.35,0)
  body extent -0.53,-0.33 0.53,0.33, height 0.4
DFN65P200X200X80_HS-6N [mm] "DFN, 6-Leads, Body 2.00x2.00mm, Pitch 0.65mm, IPC Medium Density"
  rect 0.45x0.42 smd mask+0.055: 1(-0.905,0.65) 2(-0.905,0) 3(-0.905,-0.65) 4(0.905,-0.65) 5(0.905,0) 6(0.905,0.65)
  rect 0.92x0.71 smd mask+0.055: 3(0,-0.475) 6(0,0.475)
  body extent -1.05,-1.05 1.05,1.05, height 0.65
DFN105P200X65-3N_v2 [mm] "DFN, 3-Leads, Body 2.00x2.00mm, Pitch 1.05mm, IPC Medium Density"
  rect 0.5x0.4 smd: 1(-0.8,0.65) 2(-0.8,-0.65)
  rect 1.1x1.6 smd: 3(0.25,0)
  silkscreen extent -1.2,-0.13 -1.06,1.36, body extent -1,-1 1,1, height 0.65
Fiducial [mm] "Fiducial Mark"
  round 1 smd paste-2539.97 mask+0.5: 0(0,0)
  round 1 smd far side paste-2539.97 mask+0.5: 0(0,0)
  Top Side keep-out circle w0.01: c0,0 r1
  Bottom Side keep-out circle w0.01: c0,0 r1
FPC_05P-0.5mm-RA-SMD [mm] "FPC, 5-Leads, Pitch 0,5mm"
  rect 0.6x2.6 smd: 0(-0.9,-2.3) 0(2.9,-2.3)
  rect 0.3x0.8 smd mask+0.05: 1(0,0) 2(0.5,0) 3(1,0) 4(1.5,0) 5(2,0)
  silkscreen extent -1.38,-3.93 3.38,0.08, body extent -1.3,-3.85 3.3,0.2, height 1.2
HDR_2x2-SMD [mil] "Board-Board Conn, Header, 4-way, 2-row"
  rect 40x113 smd: 1(-50,-100) 2(-50,100) 3(50,-100) 4(50,100)
  silkscreen extent -105,-135 100,100, body extent -100,-148 100,148, height 382
HDR_2x5-SMD-1.27mm-K [mm] "SMT MICRO HEADER, (1,27) .050\" Keying Shroud"
  rect 0.76x2.4 smd: 1(-2.54,-1.95) 2(-2.54,1.95) 3(-1.27,-1.95) 4(-1.27,1.95) 5(0,-1.95) 6(0,1.95) 7(1.27,-1.95) 8(1.27,1.95) 9(2.54,-1.95) 10(2.54,1.95)
  silkscreen extent -3.56,-2.38 3.25,1.75
HDR_2x10-SMD [mil] "Board-Board Conn, Header, 20-way, 2-row"
  rect 40x113 smd: 1(-450,-100) 2(-450,100) 3(-350,-100) 4(-350,100) 5(-250,-100) 6(-250,100) 7(-150,-100) 8(-150,100) 9(-50,-100) 10(-50,100) 11(50,-100) 12(50,100) 13(150,-100) 14(150,100) 15(250,-100) 16(250,100) 17(350,-100) 18(350,100) 19(450,-100) 20(450,100)
  silkscreen extent -505,-135 500,100, body extent -500,-148 500,148, height 382
HDR_2x10-SMD-1.27mm-NC [mm] "SMT MICRO HEADER, (1,27) .050\""
  rect 0.76x2.4 smd: 1(-5.715,-1.95) 2(-5.715,1.95) 3(-4.445,-1.95) 4(-4.445,1.95) 5(-3.175,-1.95) 6(-3.175,1.95) 7(-1.905,-1.95) 8(-1.905,1.95) 9(-0.635,-1.95) 10(-0.635,1.95) 11(0.635,-1.95) 12(0.635,1.95) 13(1.905,-1.95) 14(1.905,1.95) 15(3.175,-1.95) 16(3.175,1.95) 17(4.445,-1.95) 18(4.445,1.95) 19(5.715,-1.95) 20(5.715,1.95)
  silkscreen extent -6.73,-2.38 6.43,1.75
HDR_2x13-SMD [mil] "Board-Board Conn, Header, 26-way, 2-row"
  rect 40x113 smd: 1(-600,-100) 2(-600,100) 3(-500,-100) 4(-500,100) 5(-400,-100) 6(-400,100) 7(-300,-100) 8(-300,100) 9(-200,-100) 10(-200,100) 11(-100,-100) 12(-100,100) 13(0,-100) 14(0,100) 15(100,-100) 16(100,100) 17(200,-100) 18(200,100) 19(300,-100) 20(300,100) 21(400,-100) 22(400,100) 23(500,-100) 24(500,100) 25(600,-100) 26(600,100)
  silkscreen extent -655,-135 643,100, body extent -650,-152 650,152, height 390
INDC0603X03L_C [mm] "Chip Inductor, 2-Leads, Body 0.6x0.3mm, IPC High Density"
  rect 0.27x0.3 smd: 1(-0.285,0) 2(0.285,0)
  body extent -0.3,-0.15 0.3,0.15, height 0.3
INDC1005X04L_C2 [mm] "Chip Inductor, 2-Leads, Body 1.0x0.5mm, IPC High Density"
  rect 0.4x0.5 smd mask+0.05: 1(-0.4,0) 2(0.4,0)
  body extent -0.5,-0.25 0.5,0.25, height 0.5
INDC1608X06L [mm] "Chip Inductor, 2-Leads, Body 1.6x0.8mm, IPC High Density"
  rect 0.75x0.8 smd: 1(-0.675,0) 2(0.675,0)
  body extent -0.8,-0.4 0.8,0.4, height 0.8
INDC2016X10N [mm] "Chip Inductor, 2-Leads, Body 2.00x1.60mm, IPC Medium Density"
  rect 1.13x1.82 smd: 1(-0.885,0) 2(0.885,0)
  body extent -1,-0.8 1,0.8, height 1
JS102011JAQN [mm] "Slide Switches - DPDT, SMD, ON-ON"
  round 0.9 hole 0.9 unplated mask+0: 0(-3.4,0) 0(3.4,0)
  rect 0.5x0.5 smd: 1(-2.5,-1.2) 3(2.5,-1.2) 4(-2.5,1.2) 6(2.5,1.2)
  rect 1x1.6 smd: 2(0,-1.2) 5(0,1.2)
  Top Side region: -3,0.562 -2.838,0.4 -2,0.4 -2,2 -3,2
  Top Side region: -3,-0.562 -2.838,-0.4 -2,-0.4 -2,-2 -3,-2
  Top Side region: 3,0.562 2.838,0.4 2,0.4 2,2 3,2
  Top Side region: 3,-0.562 2.838,-0.4 2,-0.4 2,-2 3,-2
  silkscreen extent -4.5,-3.8 4.5,1.75, body extent -4.25,-3.75 4.25,1.75, height 3.5
LabelSilk_12x12 [mm] "PCA version label, stick-on, 12x12mm"
  silkscreen extent 0,0 12,12, body extent 0,0 12,12, height 0.05
LED_0603_G [mil] "SMD Super Bright LED, GREEN"
  rect 30x32 smd: 1(-27.5,0) 2(27.5,0)
  body extent -32,-16 32,16, height 24
LIST_1x3_SMD [mm] "Pin List, 2.54mm, SMD"
  rect 1.02x2.19 smd: 1(0,-1.465) 1(0,1.465) 2(2.54,-1.465) 2(2.54,1.465) 3(5.08,-1.465) 3(5.08,1.465)
  silkscreen extent -1.27,-1.27 6.35,1.27, body extent -1.27,-2.5 6.35,2.5, height 9.82
MountingHole_3.2_M3 [mm] "Mounting hole, 3.2mm, M3,no annular"
  round 3.2 hole 3.2 unplated mask+0: ""(0,0)
Nordic_QFN50P500X500X90-33N [mm] "QFN32 5x5x0.85mm, 0.5mm pitch - Medium Density"
  oval 0.85x0.3 smd: 1(-2.45,1.75) 2(-2.45,1.25) 3(-2.45,0.75) 4(-2.45,0.25) 5(-2.45,-0.25) 6(-2.45,-0.75) 7(-2.45,-1.25) 8(-2.45,-1.75) 17(2.45,-1.75) 18(2.45,-1.25) 19(2.45,-0.75) 20(2.45,-0.25) 21(2.45,0.25) 22(2.45,0.75) 23(2.45,1.25) 24(2.45,1.75)
  oval 0.3x0.85 smd: 9(-1.75,-2.45) 10(-1.25,-2.45) 11(-0.75,-2.45) 12(-0.25,-2.45) 13(0.25,-2.45) 14(0.75,-2.45) 15(1.25,-2.45) 16(1.75,-2.45) 25(1.75,2.45) 26(1.25,2.45) 27(0.75,2.45) 28(0.25,2.45) 29(-0.25,2.45) 30(-0.75,2.45) 31(-1.25,2.45) 32(-1.75,2.45)
  rect 3.5x3.5 smd: 33(0,0)
  silkscreen extent -3.43,-2.57 2.57,2.62, body extent -2.5,-2.5 2.5,2.5, height 0.9
QFN12P40_170X200X55L50X20 [mm] "QFN, 12-Leads, Body 2,1x1,8mm (max), Pitch 0,40mm, IPC Low Density"
  rrect50% 0.72x0.25 smd mask+0.04: 1(-0.64,0.8) 2(-0.64,0.4) 3(-0.64,0) 4(-0.64,-0.4) 5(-0.64,-0.8) 7(0.64,-0.8) 8(0.64,-0.4) 9(0.64,0) 10(0.64,0.4) 11(0.64,0.8)
  rrect50% 0.25x0.72 smd mask+0.04: 6(0,-0.85) 12(0,0.85)
  silkscreen extent -0.99,1.38 -0.79,1.58, body extent -0.85,-1 0.85,1, height 0.55
RESC0603X03L_C [mm] "Chip Resistor, 2-Leads, Body 0.6x0.3mm, IPC High Density"
  rect 0.27x0.3 smd: 1(-0.285,0) 2(0.285,0)
  body extent -0.3,-0.15 0.3,0.15, height 0.23
RESC1005X04L [mm] "Chip Resistor, 2-Leads, Body 1.0x0.5mm, IPC High Density"
  rect 0.6x0.55 smd mask+0.05: 1(-0.5,0) 2(0.5,0)
  body extent -0.5,-0.25 0.5,0.25, height 0.3
RESC1005X04L_NC [mm] "Chip Resistor, 2-Leads, Body 1.0x0.5mm, IPC High Density"
  rect 0.6x0.55 smd mask+0.05: 1(-0.5,0) 2(0.5,0)
RESC1608X06L [mm] "Chip Resistor, 2-Leads, Body 1.6x0.8mm, IPC High Density"
  rect 0.8x0.85 smd: 1(-0.7,0) 2(0.7,0)
  body extent -0.8,-0.4 0.8,0.4, height 0.4
S1751 [mm]
  rect 3.45x1.85 smd: 1(0,0)
  silkscreen extent -2.04,-1.25 2.06,1.25, body extent -1.67,-0.8 1.58,0.85, height 2.05
SD-80259-001 [mm] "USB TYPE C RECEPTACLE, 16 PIN"
  round 0.6 hole 0.6 unplated: 0(-2.89,1.315) 0(2.89,1.315)
  rect 0.6x1.14 smd: A1(-3.2,2.385) A4(-2.4,2.385) A9(2.4,2.385) A12(3.2,2.385)
  rect 0.3x1.14 smd: A5(-1.25,2.385) A6(-0.25,2.385) A7(0.25,2.385) A8(1.25,2.385) B5(1.75,2.385) B6(0.75,2.385) B7(-0.75,2.385) B8(-1.75,2.385)
  oval 0.9x2 hole 0.6 slot 1.7 at 90 deg: SHLD(-4.325,1.795) SHLD(4.325,1.795)
  oval 0.9x1.7 hole 0.6 slot 1.4 at 90 deg: SHLD(-4.325,-2.385) SHLD(4.325,-2.385)
  oval 0.9x2 on Top Paste: ""(-4.32,1.795) ""(4.32,1.795)
  oval 0.9x1.7 on Top Paste: ""(-4.32,-2.385) ""(4.32,-2.385)
  silkscreen extent -4.33,-4.48 4.33,0.46, body extent -4.48,-4.98 4.48,2.74, height 3.26
SEGGER_LOGO_S [mm] "Logo 7.82 mm x 3.84 mm, print overlay"
  silkscreen extent -3.91,-1.92 3.91,1.92
Shunt_2.54mm_Vertical [mm]
  body extent -2.51,-1.24 2.51,1.24, height 8.6
Solderbridge [mil]
  round 1 smd paste-99999: 1(-13.78,0) 2(13.78,0)
  Top Side region: -7.49,19.36 -15.76,15.74 -21.55,8.8 -23.62,0 -23.62,0 -21.55,-8.79 -15.76,-15.74 -7.49,-19.36 -7.49,-19.36 -6.18,-19.31 -5.02,-18.71 -4.22,-17.68 -3.94,-16.4 -3.94,-16.4 -3.94,16.4 -4.22,17.68 -5.02,18.71 -6.18,19.31 -7.49,19.36
  Top Side region: 7.49,-19.36 15.76,-15.74 21.55,-8.8 23.62,0 23.62,0 21.55,8.79 15.76,15.74 7.49,19.36 7.49,19.36 6.18,19.31 5.02,18.71 4.22,17.68 3.94,16.4 3.94,16.4 3.94,-16.4 4.22,-17.68 5.02,-18.71 6.18,-19.31 7.49,-19.36
Solderbridge_Shorted [mil]
  round 1 smd paste-99999: 1(-13.78,0) 2(13.78,0)
  Top Side region: -4.92,3.94 -4.92,-3.94 4.92,-3.94 4.92,3.94
  Top Side region: 7.49,-19.36 15.76,-15.74 21.55,-8.8 23.62,0 23.62,0 21.55,8.79 15.76,15.74 7.49,19.36 7.49,19.36 6.18,19.31 5.02,18.71 4.22,17.68 3.94,16.4 3.94,16.4 3.94,-16.4 4.22,-17.68 5.02,-18.71 6.18,-19.31 7.49,-19.36
  Top Side region: -7.49,19.36 -15.76,15.74 -21.55,8.8 -23.62,0 -23.62,0 -21.55,-8.79 -15.76,-15.74 -7.49,-19.36 -7.49,-19.36 -6.18,-19.31 -5.02,-18.71 -4.22,-17.68 -3.94,-16.4 -3.94,-16.4 -3.94,16.4 -4.22,17.68 -5.02,18.71 -6.18,19.31 -7.49,19.36